# EAGLE board MCP4725_Breakout-Panel-v14 (EAGLE 6.6.0), part 1 of 4
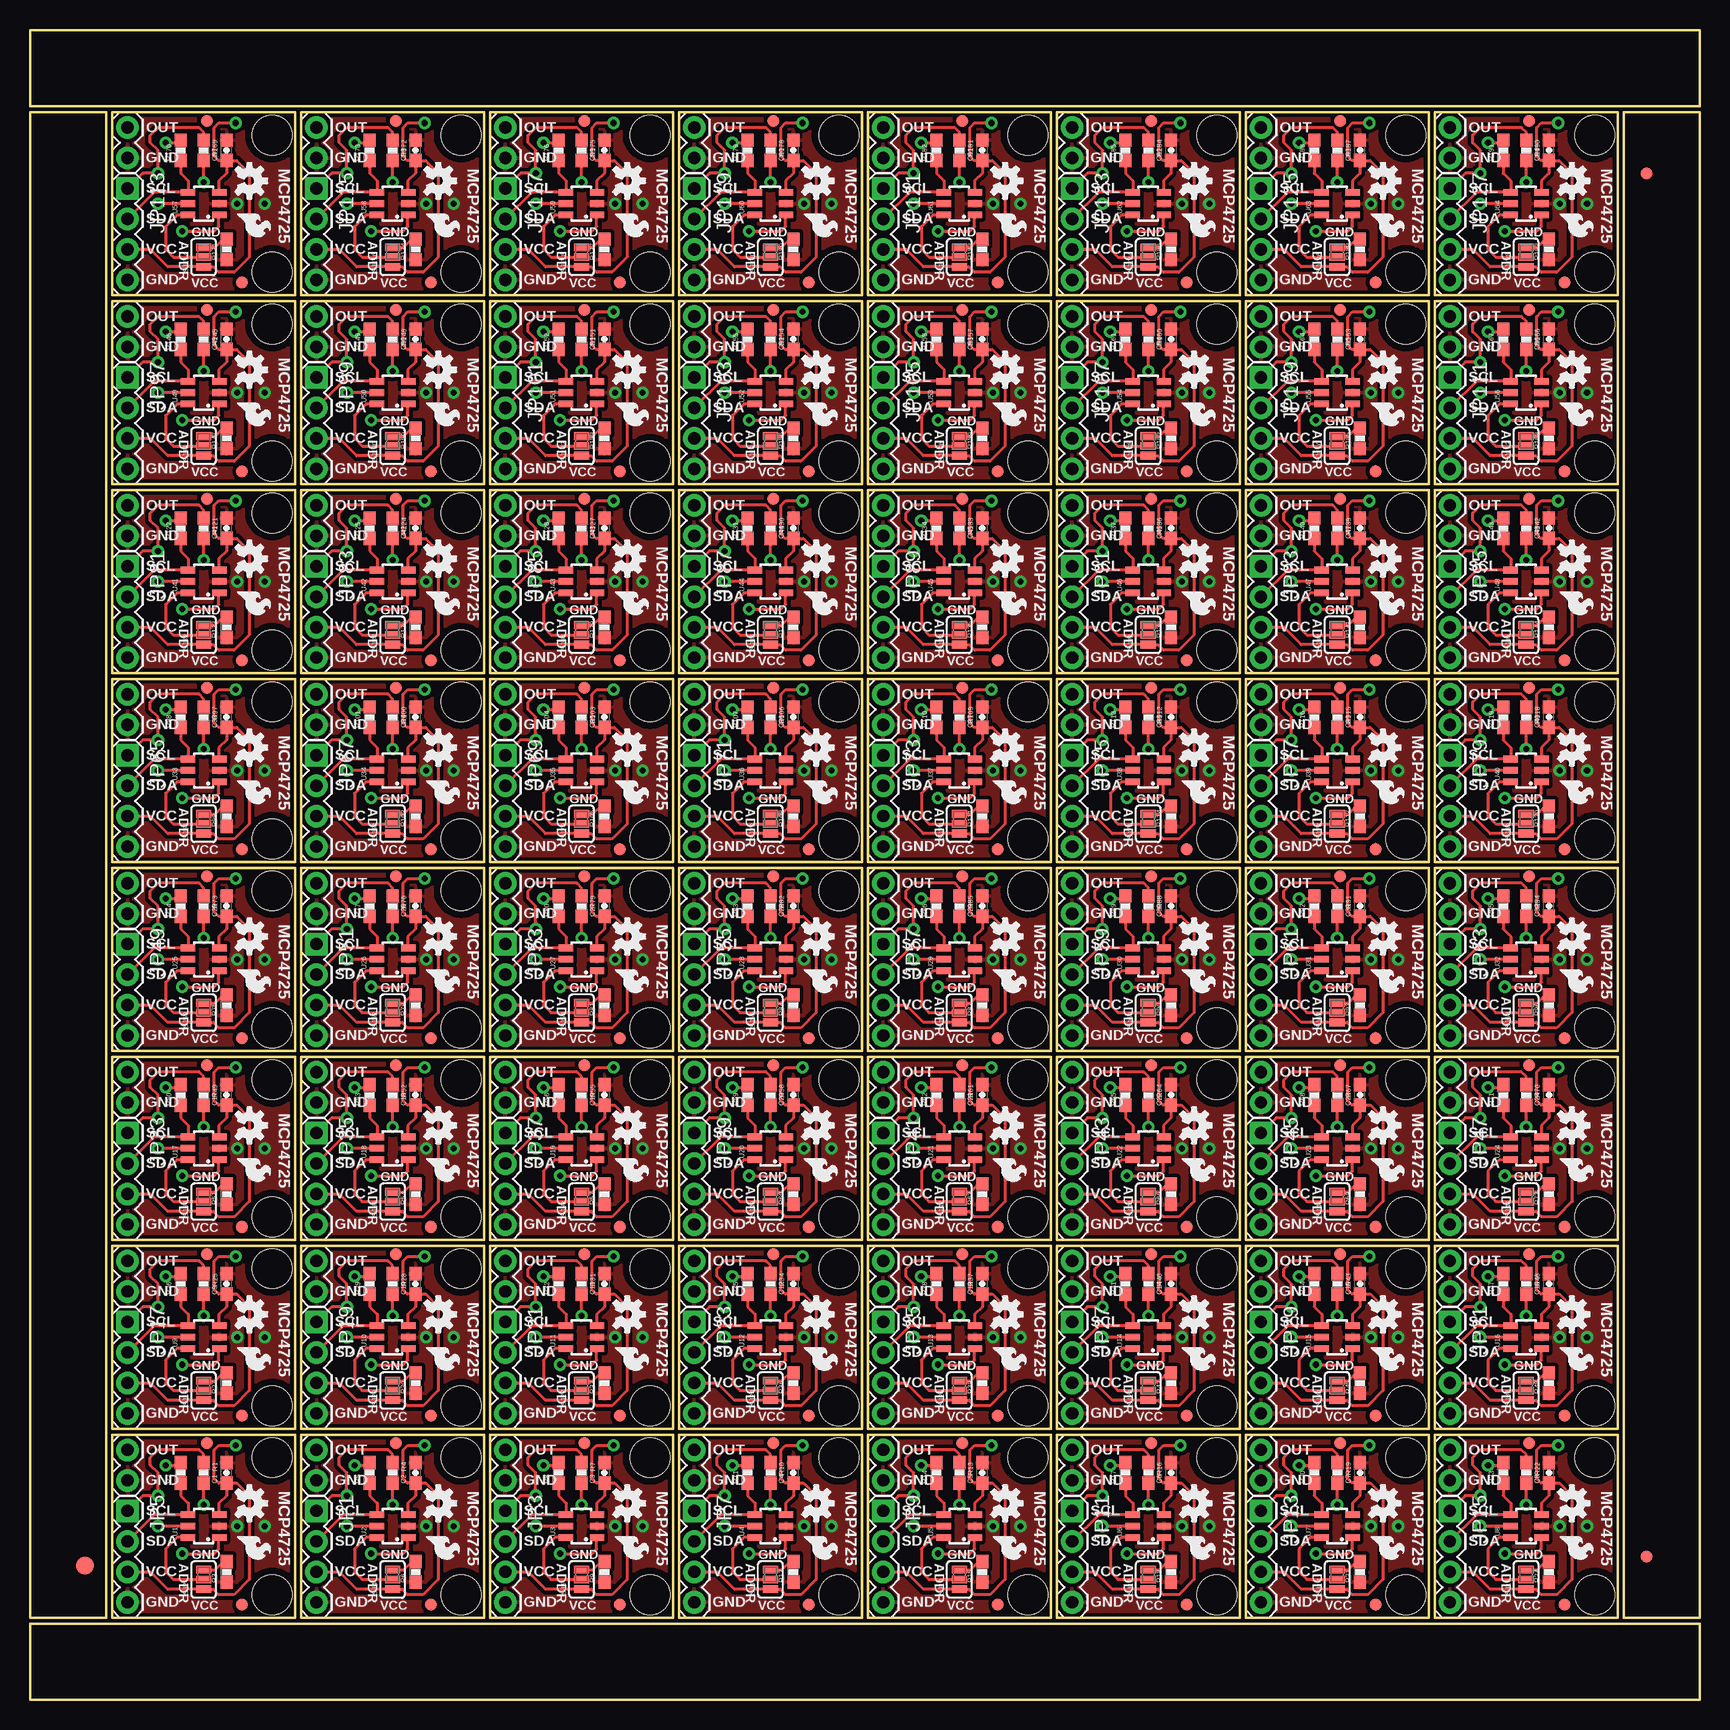
[diagram p0: board, top side]
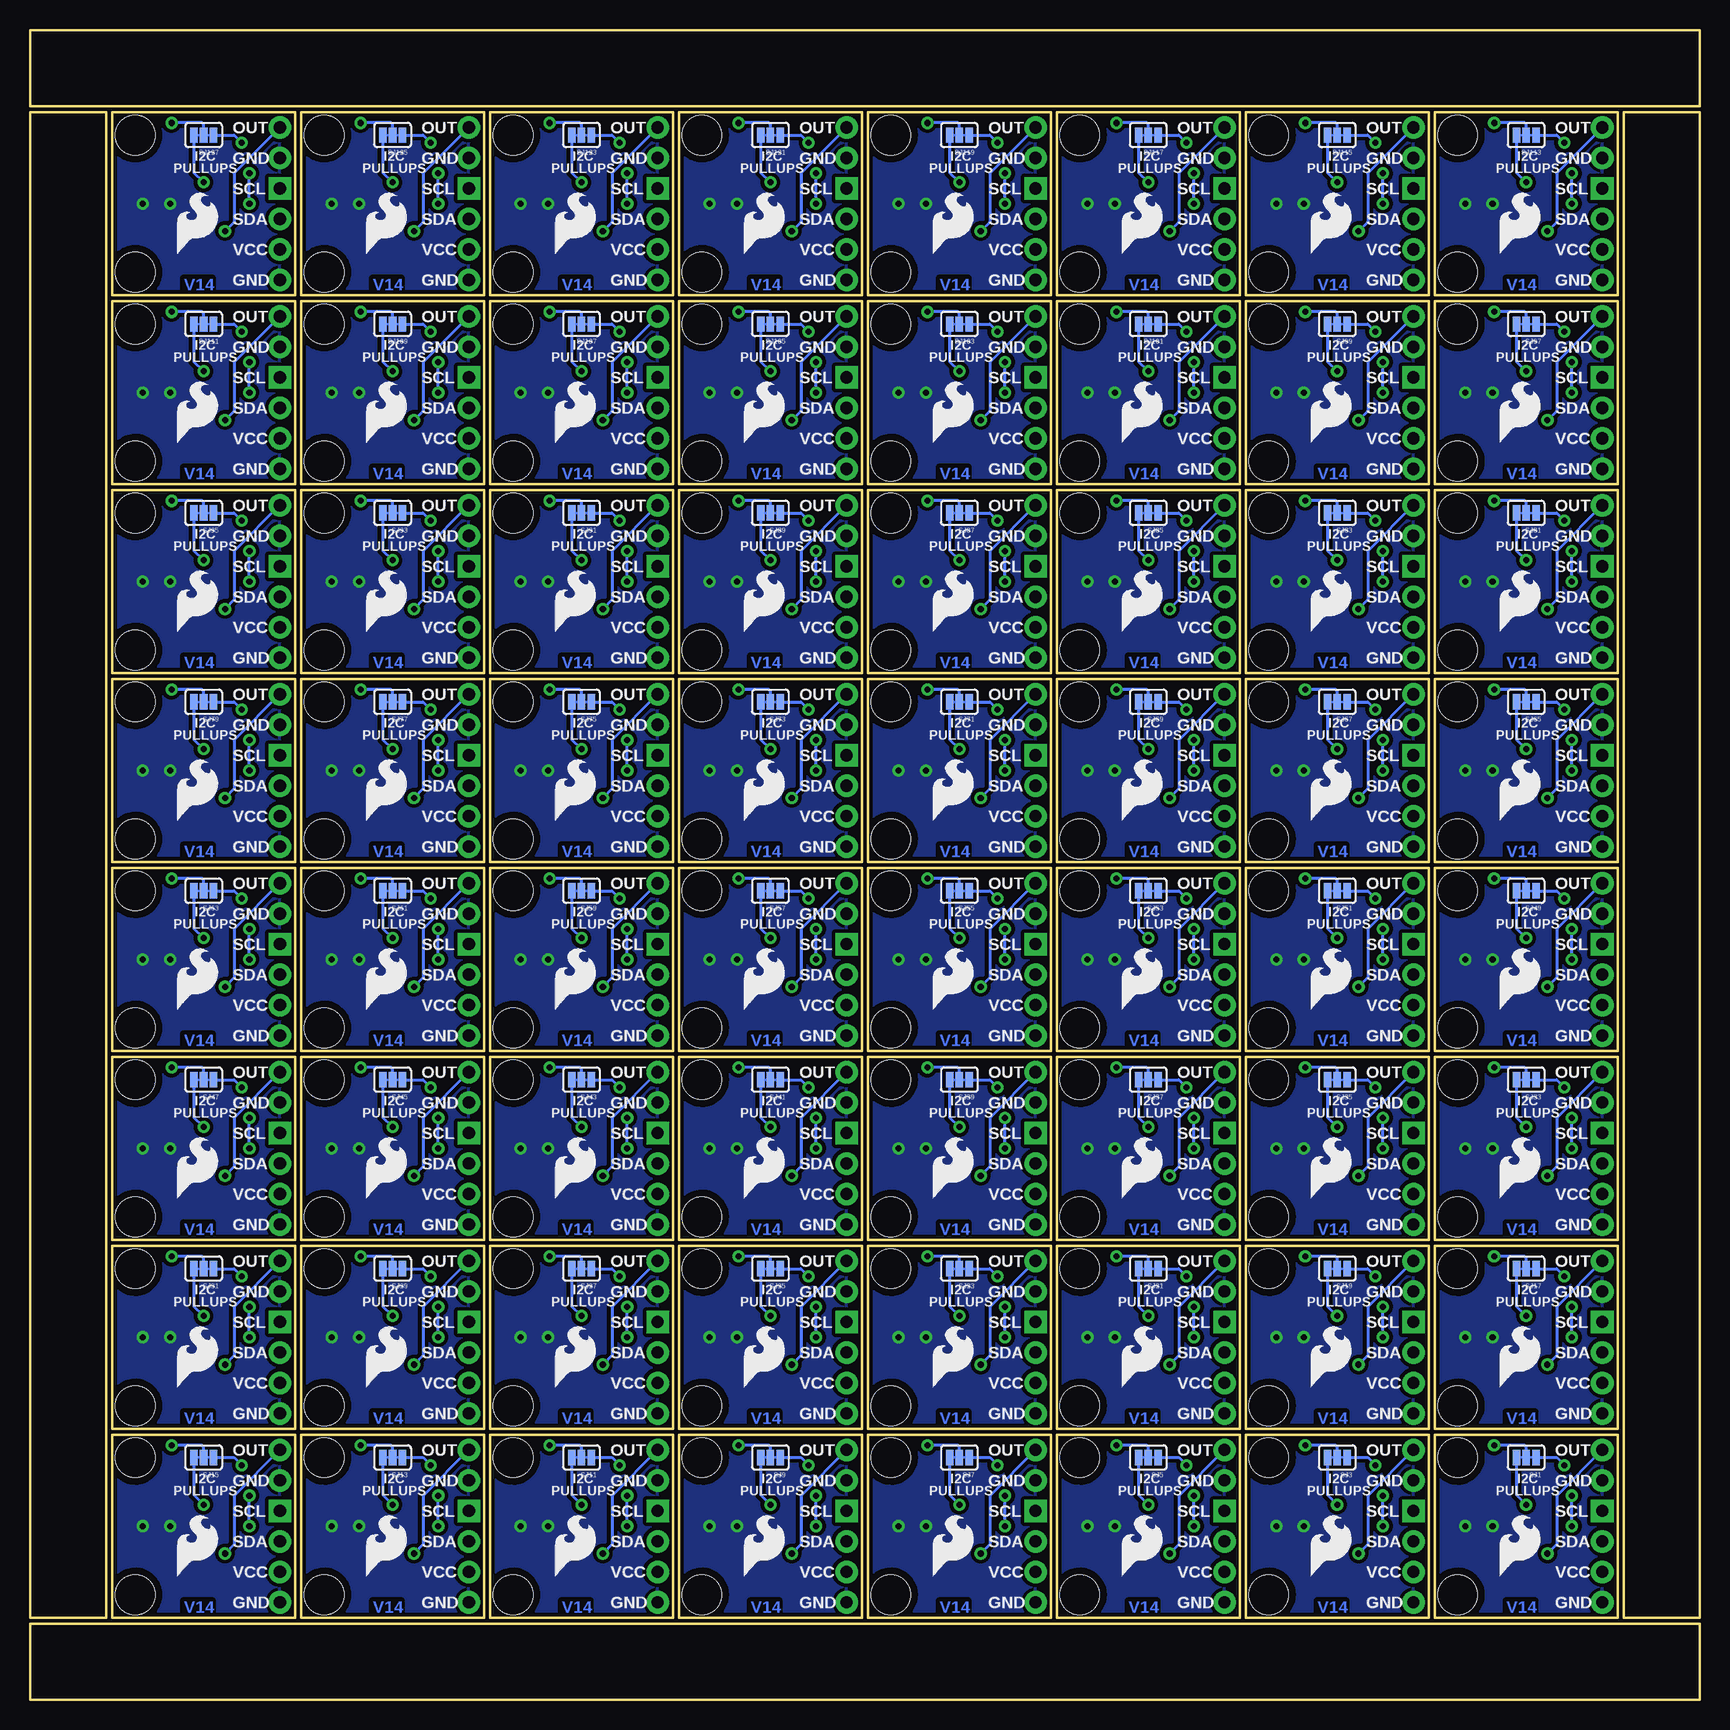
[diagram p1: board, bottom side, seen from below]

Size 139.19 x 139.19 mm. Coordinates in mm from the lower left corner, seen from the top.
Outline: 272 segments
Copper layers (1*16): Top 0.035mm / dielectric 1.5mm / Bottom 0.035mm
Design rules "SparkFun-2-layer": minimum track width 7mil, minimum drill 15mil, track to track 8mil, track to pad 8mil, pad to pad 8mil, via to via 8mil, smd to smd 8mil, copper to edge 8mil, drill to drill 8mil, minimum pad ring 12mil, minimum via ring 10mil, stop-mask expansion 4mil, vias tented up to drill 20mil, thermal gap 10mil

## Footprints (pad centres in the part's own frame; a part is rotated, then mirrored left to right if it is on the bottom)
0603-CAP = smd 1.1 x 1: 1 -0.85,0; 2 0.85,0
FIDUCIAL-1.5X3 = smd 1.5 x 1.5: 1 0,0
FIDUCIAL-1X2 = smd 1 x 1: 1 0,0
1X04 = drill 1.016 pad 1.88 square: 1 0,0 | drill 1.016 pad 1.88: 2 2.54,0; 3 5.08,0; 4 7.62,0
1X02 = drill 1.016 pad 1.88: 1 0,0; 2 2.54,0
0603-RES = smd 1.1 x 1: 1 -0.85,0; 2 0.85,0
PAD-JUMPER-3-3OF3_NC_BY_TRACE_YES_SILK_FULL_BOX = smd 0.635 x 1.27: 1 -0.813,0; 2 0,0; 3 0.813,0
PAD-JUMPER-3-2OF3_NC_BY_PASTE_YES_SILK_FULL_BOX = smd 0.635 x 1.27: 1 -0.813,0; 2 0,0; 3 0.813,0
STAND-OFF = hole 3.302: 0,0
SOT23-6-MCP4725 = smd 0.55 x 1.2: 1 0.95,-1.3; 2 0,-1.3; 3 -0.95,-1.3; 4 -0.95,1.3; 5 0,1.3; 6 0.95,1.3

## Placement (x,y rotation side)
C1  0.1uF  [0603-CAP]  16.38,18.92 90 top
C2  0.1uF  [0603-CAP]  32.13,18.92 90 top
C3  0.1uF  [0603-CAP]  47.88,18.92 90 top
C4  0.1uF  [0603-CAP]  63.63,18.92 90 top
C5  0.1uF  [0603-CAP]  79.38,18.92 90 top
C6  0.1uF  [0603-CAP]  95.12,18.92 90 top
C7  0.1uF  [0603-CAP]  110.87,18.92 90 top
C8  0.1uF  [0603-CAP]  126.62,18.92 90 top
C9  0.1uF  [0603-CAP]  16.38,34.67 90 top
C10  0.1uF  [0603-CAP]  32.13,34.67 90 top
C11  0.1uF  [0603-CAP]  47.88,34.67 90 top
C12  0.1uF  [0603-CAP]  63.63,34.67 90 top
C13  0.1uF  [0603-CAP]  79.38,34.67 90 top
C14  0.1uF  [0603-CAP]  95.12,34.67 90 top
C15  0.1uF  [0603-CAP]  110.87,34.67 90 top
C16  0.1uF  [0603-CAP]  126.62,34.67 90 top
C17  0.1uF  [0603-CAP]  16.38,50.42 90 top
C18  0.1uF  [0603-CAP]  32.13,50.42 90 top
C19  0.1uF  [0603-CAP]  47.88,50.42 90 top
C20  0.1uF  [0603-CAP]  63.63,50.42 90 top
C21  0.1uF  [0603-CAP]  79.38,50.42 90 top
C22  0.1uF  [0603-CAP]  95.12,50.42 90 top
C23  0.1uF  [0603-CAP]  110.87,50.42 90 top
C24  0.1uF  [0603-CAP]  126.62,50.42 90 top
C25  0.1uF  [0603-CAP]  16.38,66.17 90 top
C26  0.1uF  [0603-CAP]  32.13,66.17 90 top
C27  0.1uF  [0603-CAP]  47.88,66.17 90 top
C28  0.1uF  [0603-CAP]  63.63,66.17 90 top
C29  0.1uF  [0603-CAP]  79.38,66.17 90 top
C30  0.1uF  [0603-CAP]  95.12,66.17 90 top
C31  0.1uF  [0603-CAP]  110.87,66.17 90 top
C32  0.1uF  [0603-CAP]  126.62,66.17 90 top
C33  0.1uF  [0603-CAP]  16.38,81.92 90 top
C34  0.1uF  [0603-CAP]  32.13,81.92 90 top
C35  0.1uF  [0603-CAP]  47.88,81.92 90 top
C36  0.1uF  [0603-CAP]  63.63,81.92 90 top
C37  0.1uF  [0603-CAP]  79.38,81.92 90 top
C38  0.1uF  [0603-CAP]  95.12,81.92 90 top
C39  0.1uF  [0603-CAP]  110.87,81.92 90 top
C40  0.1uF  [0603-CAP]  126.62,81.92 90 top
C41  0.1uF  [0603-CAP]  16.38,97.66 90 top
C42  0.1uF  [0603-CAP]  32.13,97.66 90 top
C43  0.1uF  [0603-CAP]  47.88,97.66 90 top
C44  0.1uF  [0603-CAP]  63.63,97.66 90 top
C45  0.1uF  [0603-CAP]  79.38,97.66 90 top
C46  0.1uF  [0603-CAP]  95.12,97.66 90 top
C47  0.1uF  [0603-CAP]  110.87,97.66 90 top
C48  0.1uF  [0603-CAP]  126.62,97.66 90 top
C49  0.1uF  [0603-CAP]  16.38,113.41 90 top
C50  0.1uF  [0603-CAP]  32.13,113.41 90 top
C51  0.1uF  [0603-CAP]  47.88,113.41 90 top
C52  0.1uF  [0603-CAP]  63.63,113.41 90 top
C53  0.1uF  [0603-CAP]  79.38,113.41 90 top
C54  0.1uF  [0603-CAP]  95.12,113.41 90 top
C55  0.1uF  [0603-CAP]  110.87,113.41 90 top
C56  0.1uF  [0603-CAP]  126.62,113.41 90 top
C57  0.1uF  [0603-CAP]  16.38,129.16 90 top
C58  0.1uF  [0603-CAP]  32.13,129.16 90 top
C59  0.1uF  [0603-CAP]  47.88,129.16 90 top
C60  0.1uF  [0603-CAP]  63.63,129.16 90 top
C61  0.1uF  [0603-CAP]  79.38,129.16 90 top
C62  0.1uF  [0603-CAP]  95.12,129.16 90 top
C63  0.1uF  [0603-CAP]  110.87,129.16 90 top
C64  0.1uF  [0603-CAP]  126.62,129.16 90 top
E$1  [FIDUCIAL-1.5X3]  4.57,11.18 0 top
E$4  [FIDUCIAL-1X2]  134.75,11.94 0 top
E$5  [FIDUCIAL-1X2]  134.75,127.25 180 top
FID1  FIDUCIAL1X2  [FIDUCIAL-1X2]  17.68,7.92 0 top
FID2  FIDUCIAL1X2  [FIDUCIAL-1X2]  14.73,21.39 0 top
FID3  FIDUCIAL1X2  [FIDUCIAL-1X2]  33.43,7.92 0 top
FID4  FIDUCIAL1X2  [FIDUCIAL-1X2]  30.48,21.39 0 top
FID5  FIDUCIAL1X2  [FIDUCIAL-1X2]  49.17,7.92 0 top
FID6  FIDUCIAL1X2  [FIDUCIAL-1X2]  46.23,21.39 0 top
FID7  FIDUCIAL1X2  [FIDUCIAL-1X2]  64.92,7.92 0 top
FID8  FIDUCIAL1X2  [FIDUCIAL-1X2]  61.98,21.39 0 top
FID9  FIDUCIAL1X2  [FIDUCIAL-1X2]  80.67,7.92 0 top
FID10  FIDUCIAL1X2  [FIDUCIAL-1X2]  77.72,21.39 0 top
FID11  FIDUCIAL1X2  [FIDUCIAL-1X2]  96.42,7.92 0 top
FID12  FIDUCIAL1X2  [FIDUCIAL-1X2]  93.47,21.39 0 top
FID13  FIDUCIAL1X2  [FIDUCIAL-1X2]  112.17,7.92 0 top
FID14  FIDUCIAL1X2  [FIDUCIAL-1X2]  109.22,21.39 0 top
FID15  FIDUCIAL1X2  [FIDUCIAL-1X2]  127.91,7.92 0 top
FID16  FIDUCIAL1X2  [FIDUCIAL-1X2]  124.97,21.39 0 top
FID17  FIDUCIAL1X2  [FIDUCIAL-1X2]  17.68,23.67 0 top
FID18  FIDUCIAL1X2  [FIDUCIAL-1X2]  14.73,37.13 0 top
FID19  FIDUCIAL1X2  [FIDUCIAL-1X2]  33.43,23.67 0 top
FID20  FIDUCIAL1X2  [FIDUCIAL-1X2]  30.48,37.13 0 top
FID21  FIDUCIAL1X2  [FIDUCIAL-1X2]  49.17,23.67 0 top
FID22  FIDUCIAL1X2  [FIDUCIAL-1X2]  46.23,37.13 0 top
FID23  FIDUCIAL1X2  [FIDUCIAL-1X2]  64.92,23.67 0 top
FID24  FIDUCIAL1X2  [FIDUCIAL-1X2]  61.98,37.13 0 top
FID25  FIDUCIAL1X2  [FIDUCIAL-1X2]  80.67,23.67 0 top
FID26  FIDUCIAL1X2  [FIDUCIAL-1X2]  77.72,37.13 0 top
FID27  FIDUCIAL1X2  [FIDUCIAL-1X2]  96.42,23.67 0 top
FID28  FIDUCIAL1X2  [FIDUCIAL-1X2]  93.47,37.13 0 top
FID29  FIDUCIAL1X2  [FIDUCIAL-1X2]  112.17,23.67 0 top
FID30  FIDUCIAL1X2  [FIDUCIAL-1X2]  109.22,37.13 0 top
FID31  FIDUCIAL1X2  [FIDUCIAL-1X2]  127.91,23.67 0 top
FID32  FIDUCIAL1X2  [FIDUCIAL-1X2]  124.97,37.13 0 top
FID33  FIDUCIAL1X2  [FIDUCIAL-1X2]  17.68,39.42 0 top
FID34  FIDUCIAL1X2  [FIDUCIAL-1X2]  14.73,52.88 0 top
FID35  FIDUCIAL1X2  [FIDUCIAL-1X2]  33.43,39.42 0 top
FID36  FIDUCIAL1X2  [FIDUCIAL-1X2]  30.48,52.88 0 top
FID37  FIDUCIAL1X2  [FIDUCIAL-1X2]  49.17,39.42 0 top
FID38  FIDUCIAL1X2  [FIDUCIAL-1X2]  46.23,52.88 0 top
FID39  FIDUCIAL1X2  [FIDUCIAL-1X2]  64.92,39.42 0 top
FID40  FIDUCIAL1X2  [FIDUCIAL-1X2]  61.98,52.88 0 top
FID41  FIDUCIAL1X2  [FIDUCIAL-1X2]  80.67,39.42 0 top
FID42  FIDUCIAL1X2  [FIDUCIAL-1X2]  77.72,52.88 0 top
FID43  FIDUCIAL1X2  [FIDUCIAL-1X2]  96.42,39.42 0 top
FID44  FIDUCIAL1X2  [FIDUCIAL-1X2]  93.47,52.88 0 top
FID45  FIDUCIAL1X2  [FIDUCIAL-1X2]  112.17,39.42 0 top
FID46  FIDUCIAL1X2  [FIDUCIAL-1X2]  109.22,52.88 0 top
FID47  FIDUCIAL1X2  [FIDUCIAL-1X2]  127.91,39.42 0 top
FID48  FIDUCIAL1X2  [FIDUCIAL-1X2]  124.97,52.88 0 top
FID49  FIDUCIAL1X2  [FIDUCIAL-1X2]  17.68,55.17 0 top
FID50  FIDUCIAL1X2  [FIDUCIAL-1X2]  14.73,68.63 0 top
FID51  FIDUCIAL1X2  [FIDUCIAL-1X2]  33.43,55.17 0 top
FID52  FIDUCIAL1X2  [FIDUCIAL-1X2]  30.48,68.63 0 top
FID53  FIDUCIAL1X2  [FIDUCIAL-1X2]  49.17,55.17 0 top
FID54  FIDUCIAL1X2  [FIDUCIAL-1X2]  46.23,68.63 0 top
FID55  FIDUCIAL1X2  [FIDUCIAL-1X2]  64.92,55.17 0 top
FID56  FIDUCIAL1X2  [FIDUCIAL-1X2]  61.98,68.63 0 top
FID57  FIDUCIAL1X2  [FIDUCIAL-1X2]  80.67,55.17 0 top
FID58  FIDUCIAL1X2  [FIDUCIAL-1X2]  77.72,68.63 0 top
FID59  FIDUCIAL1X2  [FIDUCIAL-1X2]  96.42,55.17 0 top
FID60  FIDUCIAL1X2  [FIDUCIAL-1X2]  93.47,68.63 0 top
FID61  FIDUCIAL1X2  [FIDUCIAL-1X2]  112.17,55.17 0 top
FID62  FIDUCIAL1X2  [FIDUCIAL-1X2]  109.22,68.63 0 top
FID63  FIDUCIAL1X2  [FIDUCIAL-1X2]  127.91,55.17 0 top
FID64  FIDUCIAL1X2  [FIDUCIAL-1X2]  124.97,68.63 0 top
FID65  FIDUCIAL1X2  [FIDUCIAL-1X2]  17.68,70.92 0 top
FID66  FIDUCIAL1X2  [FIDUCIAL-1X2]  14.73,84.38 0 top
FID67  FIDUCIAL1X2  [FIDUCIAL-1X2]  33.43,70.92 0 top
FID68  FIDUCIAL1X2  [FIDUCIAL-1X2]  30.48,84.38 0 top
FID69  FIDUCIAL1X2  [FIDUCIAL-1X2]  49.17,70.92 0 top
FID70  FIDUCIAL1X2  [FIDUCIAL-1X2]  46.23,84.38 0 top
FID71  FIDUCIAL1X2  [FIDUCIAL-1X2]  64.92,70.92 0 top
FID72  FIDUCIAL1X2  [FIDUCIAL-1X2]  61.98,84.38 0 top
FID73  FIDUCIAL1X2  [FIDUCIAL-1X2]  80.67,70.92 0 top
FID74  FIDUCIAL1X2  [FIDUCIAL-1X2]  77.72,84.38 0 top
FID75  FIDUCIAL1X2  [FIDUCIAL-1X2]  96.42,70.92 0 top
FID76  FIDUCIAL1X2  [FIDUCIAL-1X2]  93.47,84.38 0 top
FID77  FIDUCIAL1X2  [FIDUCIAL-1X2]  112.17,70.92 0 top
FID78  FIDUCIAL1X2  [FIDUCIAL-1X2]  109.22,84.38 0 top
FID79  FIDUCIAL1X2  [FIDUCIAL-1X2]  127.91,70.92 0 top
FID80  FIDUCIAL1X2  [FIDUCIAL-1X2]  124.97,84.38 0 top
FID81  FIDUCIAL1X2  [FIDUCIAL-1X2]  17.68,86.66 0 top
FID82  FIDUCIAL1X2  [FIDUCIAL-1X2]  14.73,100.13 0 top
FID83  FIDUCIAL1X2  [FIDUCIAL-1X2]  33.43,86.66 0 top
FID84  FIDUCIAL1X2  [FIDUCIAL-1X2]  30.48,100.13 0 top
FID85  FIDUCIAL1X2  [FIDUCIAL-1X2]  49.17,86.66 0 top
FID86  FIDUCIAL1X2  [FIDUCIAL-1X2]  46.23,100.13 0 top
FID87  FIDUCIAL1X2  [FIDUCIAL-1X2]  64.92,86.66 0 top
FID88  FIDUCIAL1X2  [FIDUCIAL-1X2]  61.98,100.13 0 top
FID89  FIDUCIAL1X2  [FIDUCIAL-1X2]  80.67,86.66 0 top
FID90  FIDUCIAL1X2  [FIDUCIAL-1X2]  77.72,100.13 0 top
FID91  FIDUCIAL1X2  [FIDUCIAL-1X2]  96.42,86.66 0 top
FID92  FIDUCIAL1X2  [FIDUCIAL-1X2]  93.47,100.13 0 top
FID93  FIDUCIAL1X2  [FIDUCIAL-1X2]  112.17,86.66 0 top
FID94  FIDUCIAL1X2  [FIDUCIAL-1X2]  109.22,100.13 0 top
FID95  FIDUCIAL1X2  [FIDUCIAL-1X2]  127.91,86.66 0 top
FID96  FIDUCIAL1X2  [FIDUCIAL-1X2]  124.97,100.13 0 top
FID97  FIDUCIAL1X2  [FIDUCIAL-1X2]  17.68,102.41 0 top
FID98  FIDUCIAL1X2  [FIDUCIAL-1X2]  14.73,115.87 0 top
FID99  FIDUCIAL1X2  [FIDUCIAL-1X2]  33.43,102.41 0 top
FID100  FIDUCIAL1X2  [FIDUCIAL-1X2]  30.48,115.87 0 top
FID101  FIDUCIAL1X2  [FIDUCIAL-1X2]  49.17,102.41 0 top
FID102  FIDUCIAL1X2  [FIDUCIAL-1X2]  46.23,115.87 0 top
FID103  FIDUCIAL1X2  [FIDUCIAL-1X2]  64.92,102.41 0 top
FID104  FIDUCIAL1X2  [FIDUCIAL-1X2]  61.98,115.87 0 top
FID105  FIDUCIAL1X2  [FIDUCIAL-1X2]  80.67,102.41 0 top
FID106  FIDUCIAL1X2  [FIDUCIAL-1X2]  77.72,115.87 0 top
FID107  FIDUCIAL1X2  [FIDUCIAL-1X2]  96.42,102.41 0 top
FID108  FIDUCIAL1X2  [FIDUCIAL-1X2]  93.47,115.87 0 top
FID109  FIDUCIAL1X2  [FIDUCIAL-1X2]  112.17,102.41 0 top
FID110  FIDUCIAL1X2  [FIDUCIAL-1X2]  109.22,115.87 0 top
FID111  FIDUCIAL1X2  [FIDUCIAL-1X2]  127.91,102.41 0 top
FID112  FIDUCIAL1X2  [FIDUCIAL-1X2]  124.97,115.87 0 top
FID113  FIDUCIAL1X2  [FIDUCIAL-1X2]  17.68,118.16 0 top
FID114  FIDUCIAL1X2  [FIDUCIAL-1X2]  14.73,131.62 0 top
FID115  FIDUCIAL1X2  [FIDUCIAL-1X2]  33.43,118.16 0 top
FID116  FIDUCIAL1X2  [FIDUCIAL-1X2]  30.48,131.62 0 top
FID117  FIDUCIAL1X2  [FIDUCIAL-1X2]  49.17,118.16 0 top
FID118  FIDUCIAL1X2  [FIDUCIAL-1X2]  46.23,131.62 0 top
FID119  FIDUCIAL1X2  [FIDUCIAL-1X2]  64.92,118.16 0 top
FID120  FIDUCIAL1X2  [FIDUCIAL-1X2]  61.98,131.62 0 top
FID121  FIDUCIAL1X2  [FIDUCIAL-1X2]  80.67,118.16 0 top
FID122  FIDUCIAL1X2  [FIDUCIAL-1X2]  77.72,131.62 0 top
FID123  FIDUCIAL1X2  [FIDUCIAL-1X2]  96.42,118.16 0 top
FID124  FIDUCIAL1X2  [FIDUCIAL-1X2]  93.47,131.62 0 top
FID125  FIDUCIAL1X2  [FIDUCIAL-1X2]  112.17,118.16 0 top
FID126  FIDUCIAL1X2  [FIDUCIAL-1X2]  109.22,131.62 0 top
FID127  FIDUCIAL1X2  [FIDUCIAL-1X2]  127.91,118.16 0 top
FID128  FIDUCIAL1X2  [FIDUCIAL-1X2]  124.97,131.62 0 top
GND  LOGO-SFESK  [SFE-LOGO-FLAME]  17.27,13.59 270 top
GND1  LOGO-SFESK  [SFE-LOGO-FLAME]  33.02,13.59 270 top
GND2  LOGO-SFESK  [SFE-LOGO-FLAME]  48.77,13.59 270 top
GND3  LOGO-SFESK  [SFE-LOGO-FLAME]  64.52,13.59 270 top
GND4  LOGO-SFESK  [SFE-LOGO-FLAME]  80.26,13.59 270 top
GND5  LOGO-SFESK  [SFE-LOGO-FLAME]  96.01,13.59 270 top
GND6  LOGO-SFESK  [SFE-LOGO-FLAME]  111.76,13.59 270 top
GND7  LOGO-SFESK  [SFE-LOGO-FLAME]  127.51,13.59 270 top
GND8  LOGO-SFESK  [SFE-LOGO-FLAME]  17.27,29.34 270 top
GND9  LOGO-SFESK  [SFE-LOGO-FLAME]  33.02,29.34 270 top
GND10  LOGO-SFESK  [SFE-LOGO-FLAME]  48.77,29.34 270 top
GND11  LOGO-SFESK  [SFE-LOGO-FLAME]  64.52,29.34 270 top
GND12  LOGO-SFESK  [SFE-LOGO-FLAME]  80.26,29.34 270 top
GND13  LOGO-SFESK  [SFE-LOGO-FLAME]  96.01,29.34 270 top
GND14  LOGO-SFESK  [SFE-LOGO-FLAME]  111.76,29.34 270 top
GND15  LOGO-SFESK  [SFE-LOGO-FLAME]  127.51,29.34 270 top
GND16  LOGO-SFESK  [SFE-LOGO-FLAME]  17.27,45.09 270 top
GND17  LOGO-SFESK  [SFE-LOGO-FLAME]  33.02,45.09 270 top
GND18  LOGO-SFESK  [SFE-LOGO-FLAME]  48.77,45.09 270 top
GND19  LOGO-SFESK  [SFE-LOGO-FLAME]  64.52,45.09 270 top
GND20  LOGO-SFESK  [SFE-LOGO-FLAME]  80.26,45.09 270 top
GND21  LOGO-SFESK  [SFE-LOGO-FLAME]  96.01,45.09 270 top
GND22  LOGO-SFESK  [SFE-LOGO-FLAME]  111.76,45.09 270 top
GND23  LOGO-SFESK  [SFE-LOGO-FLAME]  127.51,45.09 270 top
GND24  LOGO-SFESK  [SFE-LOGO-FLAME]  17.27,60.83 270 top
GND25  LOGO-SFESK  [SFE-LOGO-FLAME]  33.02,60.83 270 top
GND26  LOGO-SFESK  [SFE-LOGO-FLAME]  48.77,60.83 270 top
GND27  LOGO-SFESK  [SFE-LOGO-FLAME]  64.52,60.83 270 top
GND28  LOGO-SFESK  [SFE-LOGO-FLAME]  80.26,60.83 270 top
GND29  LOGO-SFESK  [SFE-LOGO-FLAME]  96.01,60.83 270 top
GND30  LOGO-SFESK  [SFE-LOGO-FLAME]  111.76,60.83 270 top
GND31  LOGO-SFESK  [SFE-LOGO-FLAME]  127.51,60.83 270 top
GND32  LOGO-SFESK  [SFE-LOGO-FLAME]  17.27,76.58 270 top
GND33  LOGO-SFESK  [SFE-LOGO-FLAME]  33.02,76.58 270 top
GND34  LOGO-SFESK  [SFE-LOGO-FLAME]  48.77,76.58 270 top
GND35  LOGO-SFESK  [SFE-LOGO-FLAME]  64.52,76.58 270 top
GND36  LOGO-SFESK  [SFE-LOGO-FLAME]  80.26,76.58 270 top
GND37  LOGO-SFESK  [SFE-LOGO-FLAME]  96.01,76.58 270 top
GND38  LOGO-SFESK  [SFE-LOGO-FLAME]  111.76,76.58 270 top
GND39  LOGO-SFESK  [SFE-LOGO-FLAME]  127.51,76.58 270 top
GND40  LOGO-SFESK  [SFE-LOGO-FLAME]  17.27,92.33 270 top
GND41  LOGO-SFESK  [SFE-LOGO-FLAME]  33.02,92.33 270 top
GND42  LOGO-SFESK  [SFE-LOGO-FLAME]  48.77,92.33 270 top
GND43  LOGO-SFESK  [SFE-LOGO-FLAME]  64.52,92.33 270 top
GND44  LOGO-SFESK  [SFE-LOGO-FLAME]  80.26,92.33 270 top
GND45  LOGO-SFESK  [SFE-LOGO-FLAME]  96.01,92.33 270 top
GND46  LOGO-SFESK  [SFE-LOGO-FLAME]  111.76,92.33 270 top
GND47  LOGO-SFESK  [SFE-LOGO-FLAME]  127.51,92.33 270 top
GND48  LOGO-SFESK  [SFE-LOGO-FLAME]  17.27,108.08 270 top
GND49  LOGO-SFESK  [SFE-LOGO-FLAME]  33.02,108.08 270 top
GND50  LOGO-SFESK  [SFE-LOGO-FLAME]  48.77,108.08 270 top
GND51  LOGO-SFESK  [SFE-LOGO-FLAME]  64.52,108.08 270 top
GND52  LOGO-SFESK  [SFE-LOGO-FLAME]  80.26,108.08 270 top
GND53  LOGO-SFESK  [SFE-LOGO-FLAME]  96.01,108.08 270 top
GND54  LOGO-SFESK  [SFE-LOGO-FLAME]  111.76,108.08 270 top
GND55  LOGO-SFESK  [SFE-LOGO-FLAME]  127.51,108.08 270 top
GND56  LOGO-SFESK  [SFE-LOGO-FLAME]  17.27,123.83 270 top
GND57  LOGO-SFESK  [SFE-LOGO-FLAME]  33.02,123.83 270 top
GND58  LOGO-SFESK  [SFE-LOGO-FLAME]  48.77,123.83 270 top
GND59  LOGO-SFESK  [SFE-LOGO-FLAME]  64.52,123.83 270 top
GND60  LOGO-SFESK  [SFE-LOGO-FLAME]  80.26,123.83 270 top
GND61  LOGO-SFESK  [SFE-LOGO-FLAME]  96.01,123.83 270 top
GND62  LOGO-SFESK  [SFE-LOGO-FLAME]  111.76,123.83 270 top
GND63  LOGO-SFESK  [SFE-LOGO-FLAME]  127.51,123.83 270 top
JP1  [1X04]  23.88,15.75 270 top
JP2  M02PTH  [1X02]  23.88,18.29 90 top
JP3  [1X04]  39.62,15.75 270 top
JP4  M02PTH  [1X02]  39.62,18.29 90 top
JP5  [1X04]  8.13,15.75 270 top
JP6  M02PTH  [1X02]  8.13,18.29 90 top
JP7  [1X04]  55.37,15.75 270 top
JP8  M02PTH  [1X02]  55.37,18.29 90 top
JP9  [1X04]  71.12,15.75 270 top
JP10  M02PTH  [1X02]  71.12,18.29 90 top
JP11  [1X04]  86.87,15.75 270 top
JP12  M02PTH  [1X02]  86.87,18.29 90 top
JP13  [1X04]  102.62,15.75 270 top
JP14  M02PTH  [1X02]  102.62,18.29 90 top
JP15  [1X04]  118.36,15.75 270 top
JP16  M02PTH  [1X02]  118.36,18.29 90 top
JP17  [1X04]  8.13,31.5 270 top
JP18  M02PTH  [1X02]  8.13,34.04 90 top
JP19  [1X04]  23.88,31.5 270 top
JP20  M02PTH  [1X02]  23.88,34.04 90 top
JP21  [1X04]  39.62,31.5 270 top
JP22  M02PTH  [1X02]  39.62,34.04 90 top
JP23  [1X04]  55.37,31.5 270 top
JP24  M02PTH  [1X02]  55.37,34.04 90 top
JP25  [1X04]  71.12,31.5 270 top
JP26  M02PTH  [1X02]  71.12,34.04 90 top
JP27  [1X04]  86.87,31.5 270 top
JP28  M02PTH  [1X02]  86.87,34.04 90 top
JP29  [1X04]  102.62,31.5 270 top
JP30  M02PTH  [1X02]  102.62,34.04 90 top
JP31  [1X04]  118.36,31.5 270 top
JP32  M02PTH  [1X02]  118.36,34.04 90 top
JP33  [1X04]  8.13,47.24 270 top
JP34  M02PTH  [1X02]  8.13,49.78 90 top
JP35  [1X04]  23.88,47.24 270 top
JP36  M02PTH  [1X02]  23.88,49.78 90 top
JP37  [1X04]  39.62,47.24 270 top
JP38  M02PTH  [1X02]  39.62,49.78 90 top
JP39  [1X04]  55.37,47.24 270 top
JP40  M02PTH  [1X02]  55.37,49.78 90 top
JP41  [1X04]  71.12,47.24 270 top
JP42  M02PTH  [1X02]  71.12,49.78 90 top
JP43  [1X04]  86.87,47.24 270 top
JP44  M02PTH  [1X02]  86.87,49.78 90 top
JP45  [1X04]  102.62,47.24 270 top
JP46  M02PTH  [1X02]  102.62,49.78 90 top
JP47  [1X04]  118.36,47.24 270 top
JP48  M02PTH  [1X02]  118.36,49.78 90 top
JP49  [1X04]  8.13,62.99 270 top
JP50  M02PTH  [1X02]  8.13,65.53 90 top
JP51  [1X04]  23.88,62.99 270 top
JP52  M02PTH  [1X02]  23.88,65.53 90 top
JP53  [1X04]  39.62,62.99 270 top
JP54  M02PTH  [1X02]  39.62,65.53 90 top
JP55  [1X04]  55.37,62.99 270 top
JP56  M02PTH  [1X02]  55.37,65.53 90 top
JP57  [1X04]  71.12,62.99 270 top
JP58  M02PTH  [1X02]  71.12,65.53 90 top
JP59  [1X04]  86.87,62.99 270 top
JP60  M02PTH  [1X02]  86.87,65.53 90 top
JP61  [1X04]  102.62,62.99 270 top
JP62  M02PTH  [1X02]  102.62,65.53 90 top
JP63  [1X04]  118.36,62.99 270 top
JP64  M02PTH  [1X02]  118.36,65.53 90 top
JP65  [1X04]  8.13,78.74 270 top
JP66  M02PTH  [1X02]  8.13,81.28 90 top
JP67  [1X04]  23.88,78.74 270 top
JP68  M02PTH  [1X02]  23.88,81.28 90 top
JP69  [1X04]  39.62,78.74 270 top
JP70  M02PTH  [1X02]  39.62,81.28 90 top
JP71  [1X04]  55.37,78.74 270 top
JP72  M02PTH  [1X02]  55.37,81.28 90 top
JP73  [1X04]  71.12,78.74 270 top
JP74  M02PTH  [1X02]  71.12,81.28 90 top
JP75  [1X04]  86.87,78.74 270 top
JP76  M02PTH  [1X02]  86.87,81.28 90 top
JP77  [1X04]  102.62,78.74 270 top
JP78  M02PTH  [1X02]  102.62,81.28 90 top
JP79  [1X04]  118.36,78.74 270 top
JP80  M02PTH  [1X02]  118.36,81.28 90 top
JP81  [1X04]  8.13,94.49 270 top
JP82  M02PTH  [1X02]  8.13,97.03 90 top
JP83  [1X04]  23.88,94.49 270 top
JP84  M02PTH  [1X02]  23.88,97.03 90 top
JP85  [1X04]  39.62,94.49 270 top
JP86  M02PTH  [1X02]  39.62,97.03 90 top
JP87  [1X04]  55.37,94.49 270 top
JP88  M02PTH  [1X02]  55.37,97.03 90 top
JP89  [1X04]  71.12,94.49 270 top
JP90  M02PTH  [1X02]  71.12,97.03 90 top
JP91  [1X04]  86.87,94.49 270 top
JP92  M02PTH  [1X02]  86.87,97.03 90 top
JP93  [1X04]  102.62,94.49 270 top
JP94  M02PTH  [1X02]  102.62,97.03 90 top
JP95  [1X04]  118.36,94.49 270 top
JP96  M02PTH  [1X02]  118.36,97.03 90 top
JP97  [1X04]  8.13,110.24 270 top
JP98  M02PTH  [1X02]  8.13,112.78 90 top
JP99  [1X04]  23.88,110.24 270 top
JP100  M02PTH  [1X02]  23.88,112.78 90 top
JP101  [1X04]  39.62,110.24 270 top
JP102  M02PTH  [1X02]  39.62,112.78 90 top
JP103  [1X04]  55.37,110.24 270 top
JP104  M02PTH  [1X02]  55.37,112.78 90 top
JP105  [1X04]  71.12,110.24 270 top
JP106  M02PTH  [1X02]  71.12,112.78 90 top
JP107  [1X04]  86.87,110.24 270 top
JP108  M02PTH  [1X02]  86.87,112.78 90 top
JP109  [1X04]  102.62,110.24 270 top
JP110  M02PTH  [1X02]  102.62,112.78 90 top
JP111  [1X04]  118.36,110.24 270 top
JP112  M02PTH  [1X02]  118.36,112.78 90 top
JP113  [1X04]  8.13,125.98 270 top
JP114  M02PTH  [1X02]  8.13,128.52 90 top
JP115  [1X04]  23.88,125.98 270 top
JP116  M02PTH  [1X02]  23.88,128.52 90 top
JP117  [1X04]  39.62,125.98 270 top
JP118  M02PTH  [1X02]  39.62,128.52 90 top
JP119  [1X04]  55.37,125.98 270 top
JP120  M02PTH  [1X02]  55.37,128.52 90 top
JP121  [1X04]  71.12,125.98 270 top
JP122  M02PTH  [1X02]  71.12,128.52 90 top
JP123  [1X04]  86.87,125.98 270 top
JP124  M02PTH  [1X02]  86.87,128.52 90 top
JP125  [1X04]  102.62,125.98 270 top
JP126  M02PTH  [1X02]  102.62,128.52 90 top
JP127  [1X04]  118.36,125.98 270 top
JP128  M02PTH  [1X02]  118.36,128.52 90 top
LOGO1  OSHW-LOGOS  [OSHW-LOGO-S]  18.29,16.38 270 top
LOGO2  OSHW-LOGOS  [OSHW-LOGO-S]  34.04,16.38 270 top
LOGO3  OSHW-LOGOS  [OSHW-LOGO-S]  49.78,16.38 270 top
LOGO4  OSHW-LOGOS  [OSHW-LOGO-S]  65.53,16.38 270 top
LOGO5  OSHW-LOGOS  [OSHW-LOGO-S]  81.28,16.38 270 top
LOGO6  OSHW-LOGOS  [OSHW-LOGO-S]  97.03,16.38 270 top
LOGO7  OSHW-LOGOS  [OSHW-LOGO-S]  112.78,16.38 270 top
LOGO8  OSHW-LOGOS  [OSHW-LOGO-S]  128.52,16.38 270 top
LOGO9  OSHW-LOGOS  [OSHW-LOGO-S]  18.29,32.13 270 top
LOGO10  OSHW-LOGOS  [OSHW-LOGO-S]  34.04,32.13 270 top
LOGO11  OSHW-LOGOS  [OSHW-LOGO-S]  49.78,32.13 270 top
LOGO12  OSHW-LOGOS  [OSHW-LOGO-S]  65.53,32.13 270 top
LOGO13  OSHW-LOGOS  [OSHW-LOGO-S]  81.28,32.13 270 top
LOGO14  OSHW-LOGOS  [OSHW-LOGO-S]  97.03,32.13 270 top
LOGO15  OSHW-LOGOS  [OSHW-LOGO-S]  112.78,32.13 270 top
LOGO16  OSHW-LOGOS  [OSHW-LOGO-S]  128.52,32.13 270 top
LOGO17  OSHW-LOGOS  [OSHW-LOGO-S]  18.29,47.88 270 top
LOGO18  OSHW-LOGOS  [OSHW-LOGO-S]  34.04,47.88 270 top
LOGO19  OSHW-LOGOS  [OSHW-LOGO-S]  49.78,47.88 270 top
LOGO20  OSHW-LOGOS  [OSHW-LOGO-S]  65.53,47.88 270 top
LOGO21  OSHW-LOGOS  [OSHW-LOGO-S]  81.28,47.88 270 top
LOGO22  OSHW-LOGOS  [OSHW-LOGO-S]  97.03,47.88 270 top
LOGO23  OSHW-LOGOS  [OSHW-LOGO-S]  112.78,47.88 270 top
LOGO24  OSHW-LOGOS  [OSHW-LOGO-S]  128.52,47.88 270 top
LOGO25  OSHW-LOGOS  [OSHW-LOGO-S]  18.29,63.63 270 top
LOGO26  OSHW-LOGOS  [OSHW-LOGO-S]  34.04,63.63 270 top
LOGO27  OSHW-LOGOS  [OSHW-LOGO-S]  49.78,63.63 270 top
LOGO28  OSHW-LOGOS  [OSHW-LOGO-S]  65.53,63.63 270 top
LOGO29  OSHW-LOGOS  [OSHW-LOGO-S]  81.28,63.63 270 top
LOGO30  OSHW-LOGOS  [OSHW-LOGO-S]  97.03,63.63 270 top
LOGO31  OSHW-LOGOS  [OSHW-LOGO-S]  112.78,63.63 270 top
LOGO32  OSHW-LOGOS  [OSHW-LOGO-S]  128.52,63.63 270 top
LOGO33  OSHW-LOGOS  [OSHW-LOGO-S]  18.29,79.38 270 top
LOGO34  OSHW-LOGOS  [OSHW-LOGO-S]  34.04,79.38 270 top
LOGO35  OSHW-LOGOS  [OSHW-LOGO-S]  49.78,79.38 270 top
LOGO36  OSHW-LOGOS  [OSHW-LOGO-S]  65.53,79.38 270 top
LOGO37  OSHW-LOGOS  [OSHW-LOGO-S]  81.28,79.38 270 top
LOGO38  OSHW-LOGOS  [OSHW-LOGO-S]  97.03,79.38 270 top
LOGO39  OSHW-LOGOS  [OSHW-LOGO-S]  112.78,79.38 270 top
LOGO40  OSHW-LOGOS  [OSHW-LOGO-S]  128.52,79.38 270 top
LOGO41  OSHW-LOGOS  [OSHW-LOGO-S]  18.29,95.12 270 top
LOGO42  OSHW-LOGOS  [OSHW-LOGO-S]  34.04,95.12 270 top
LOGO43  OSHW-LOGOS  [OSHW-LOGO-S]  49.78,95.12 270 top
LOGO44  OSHW-LOGOS  [OSHW-LOGO-S]  65.53,95.12 270 top
LOGO45  OSHW-LOGOS  [OSHW-LOGO-S]  81.28,95.12 270 top
LOGO46  OSHW-LOGOS  [OSHW-LOGO-S]  97.03,95.12 270 top
LOGO47  OSHW-LOGOS  [OSHW-LOGO-S]  112.78,95.12 270 top
LOGO48  OSHW-LOGOS  [OSHW-LOGO-S]  128.52,95.12 270 top
LOGO49  OSHW-LOGOS  [OSHW-LOGO-S]  18.29,110.87 270 top
LOGO50  OSHW-LOGOS  [OSHW-LOGO-S]  34.04,110.87 270 top
LOGO51  OSHW-LOGOS  [OSHW-LOGO-S]  49.78,110.87 270 top
LOGO52  OSHW-LOGOS  [OSHW-LOGO-S]  65.53,110.87 270 top
LOGO53  OSHW-LOGOS  [OSHW-LOGO-S]  81.28,110.87 270 top
LOGO54  OSHW-LOGOS  [OSHW-LOGO-S]  97.03,110.87 270 top
LOGO55  OSHW-LOGOS  [OSHW-LOGO-S]  112.78,110.87 270 top
LOGO56  OSHW-LOGOS  [OSHW-LOGO-S]  128.52,110.87 270 top
LOGO57  OSHW-LOGOS  [OSHW-LOGO-S]  18.29,126.62 270 top
LOGO58  OSHW-LOGOS  [OSHW-LOGO-S]  34.04,126.62 270 top
LOGO59  OSHW-LOGOS  [OSHW-LOGO-S]  49.78,126.62 270 top
LOGO60  OSHW-LOGOS  [OSHW-LOGO-S]  65.53,126.62 270 top
LOGO61  OSHW-LOGOS  [OSHW-LOGO-S]  81.28,126.62 270 top
LOGO62  OSHW-LOGOS  [OSHW-LOGO-S]  97.03,126.62 270 top
LOGO63  OSHW-LOGOS  [OSHW-LOGO-S]  112.78,126.62 270 top
LOGO64  OSHW-LOGOS  [OSHW-LOGO-S]  128.52,126.62 270 top
R1  4.7k  [0603-RES]  14.48,18.92 270 top
R2  4.7k  [0603-RES]  12.57,18.92 90 top
R3  10k  [0603-RES]  16.38,10.67 90 top
R4  4.7k  [0603-RES]  30.23,18.92 270 top
R5  4.7k  [0603-RES]  28.32,18.92 90 top
R6  10k  [0603-RES]  32.13,10.67 90 top
R7  4.7k  [0603-RES]  45.97,18.92 270 top
R8  4.7k  [0603-RES]  44.07,18.92 90 top
R9  10k  [0603-RES]  47.88,10.67 90 top
R10  4.7k  [0603-RES]  61.72,18.92 270 top
R11  4.7k  [0603-RES]  59.82,18.92 90 top
R12  10k  [0603-RES]  63.63,10.67 90 top
R13  4.7k  [0603-RES]  77.47,18.92 270 top
R14  4.7k  [0603-RES]  75.56,18.92 90 top
R15  10k  [0603-RES]  79.38,10.67 90 top
R16  4.7k  [0603-RES]  93.22,18.92 270 top
R17  4.7k  [0603-RES]  91.31,18.92 90 top
R18  10k  [0603-RES]  95.12,10.67 90 top
R19  4.7k  [0603-RES]  108.97,18.92 270 top
R20  4.7k  [0603-RES]  107.06,18.92 90 top
R21  10k  [0603-RES]  110.87,10.67 90 top
R22  4.7k  [0603-RES]  124.71,18.92 270 top
R23  4.7k  [0603-RES]  122.81,18.92 90 top
R24  10k  [0603-RES]  126.62,10.67 90 top
R25  4.7k  [0603-RES]  14.48,34.67 270 top
R26  4.7k  [0603-RES]  12.57,34.67 90 top
R27  10k  [0603-RES]  16.38,26.42 90 top
R28  4.7k  [0603-RES]  30.23,34.67 270 top
R29  4.7k  [0603-RES]  28.32,34.67 90 top
R30  10k  [0603-RES]  32.13,26.42 90 top
R31  4.7k  [0603-RES]  45.97,34.67 270 top
R32  4.7k  [0603-RES]  44.07,34.67 90 top
R33  10k  [0603-RES]  47.88,26.42 90 top
R34  4.7k  [0603-RES]  61.72,34.67 270 top
R35  4.7k  [0603-RES]  59.82,34.67 90 top
R36  10k  [0603-RES]  63.63,26.42 90 top
R37  4.7k  [0603-RES]  77.47,34.67 270 top
R38  4.7k  [0603-RES]  75.56,34.67 90 top
R39  10k  [0603-RES]  79.38,26.42 90 top
R40  4.7k  [0603-RES]  93.22,34.67 270 top
R41  4.7k  [0603-RES]  91.31,34.67 90 top
R42  10k  [0603-RES]  95.12,26.42 90 top
R43  4.7k  [0603-RES]  108.97,34.67 270 top
R44  4.7k  [0603-RES]  107.06,34.67 90 top
R45  10k  [0603-RES]  110.87,26.42 90 top
R46  4.7k  [0603-RES]  124.71,34.67 270 top
R47  4.7k  [0603-RES]  122.81,34.67 90 top
R48  10k  [0603-RES]  126.62,26.42 90 top
R49  4.7k  [0603-RES]  14.48,50.42 270 top
R50  4.7k  [0603-RES]  12.57,50.42 90 top
R51  10k  [0603-RES]  16.38,42.16 90 top
R52  4.7k  [0603-RES]  30.23,50.42 270 top
R53  4.7k  [0603-RES]  28.32,50.42 90 top
R54  10k  [0603-RES]  32.13,42.16 90 top
R55  4.7k  [0603-RES]  45.97,50.42 270 top
R56  4.7k  [0603-RES]  44.07,50.42 90 top
R57  10k  [0603-RES]  47.88,42.16 90 top
R58  4.7k  [0603-RES]  61.72,50.42 270 top
R59  4.7k  [0603-RES]  59.82,50.42 90 top
R60  10k  [0603-RES]  63.63,42.16 90 top
R61  4.7k  [0603-RES]  77.47,50.42 270 top
R62  4.7k  [0603-RES]  75.56,50.42 90 top
R63  10k  [0603-RES]  79.38,42.16 90 top
R64  4.7k  [0603-RES]  93.22,50.42 270 top
R65  4.7k  [0603-RES]  91.31,50.42 90 top
R66  10k  [0603-RES]  95.12,42.16 90 top
R67  4.7k  [0603-RES]  108.97,50.42 270 top
R68  4.7k  [0603-RES]  107.06,50.42 90 top
R69  10k  [0603-RES]  110.87,42.16 90 top
R70  4.7k  [0603-RES]  124.71,50.42 270 top
R71  4.7k  [0603-RES]  122.81,50.42 90 top
R72  10k  [0603-RES]  126.62,42.16 90 top
R73  4.7k  [0603-RES]  14.48,66.17 270 top
R74  4.7k  [0603-RES]  12.57,66.17 90 top
R75  10k  [0603-RES]  16.38,57.91 90 top
R76  4.7k  [0603-RES]  30.23,66.17 270 top
R77  4.7k  [0603-RES]  28.32,66.17 90 top
R78  10k  [0603-RES]  32.13,57.91 90 top
R79  4.7k  [0603-RES]  45.97,66.17 270 top
R80  4.7k  [0603-RES]  44.07,66.17 90 top
R81  10k  [0603-RES]  47.88,57.91 90 top
R82  4.7k  [0603-RES]  61.72,66.17 270 top
R83  4.7k  [0603-RES]  59.82,66.17 90 top
R84  10k  [0603-RES]  63.63,57.91 90 top
R85  4.7k  [0603-RES]  77.47,66.17 270 top
R86  4.7k  [0603-RES]  75.56,66.17 90 top
R87  10k  [0603-RES]  79.38,57.91 90 top
R88  4.7k  [0603-RES]  93.22,66.17 270 top
R89  4.7k  [0603-RES]  91.31,66.17 90 top
R90  10k  [0603-RES]  95.12,57.91 90 top
R91  4.7k  [0603-RES]  108.97,66.17 270 top
R92  4.7k  [0603-RES]  107.06,66.17 90 top
R93  10k  [0603-RES]  110.87,57.91 90 top
R94  4.7k  [0603-RES]  124.71,66.17 270 top
R95  4.7k  [0603-RES]  122.81,66.17 90 top
R96  10k  [0603-RES]  126.62,57.91 90 top
R97  4.7k  [0603-RES]  14.48,81.92 270 top
R98  4.7k  [0603-RES]  12.57,81.92 90 top
R99  10k  [0603-RES]  16.38,73.66 90 top
R100  4.7k  [0603-RES]  30.23,81.92 270 top
R101  4.7k  [0603-RES]  28.32,81.92 90 top
R102  10k  [0603-RES]  32.13,73.66 90 top
R103  4.7k  [0603-RES]  45.97,81.92 270 top
R104  4.7k  [0603-RES]  44.07,81.92 90 top
R105  10k  [0603-RES]  47.88,73.66 90 top
R106  4.7k  [0603-RES]  61.72,81.92 270 top
R107  4.7k  [0603-RES]  59.82,81.92 90 top
R108  10k  [0603-RES]  63.63,73.66 90 top
R109  4.7k  [0603-RES]  77.47,81.92 270 top
R110  4.7k  [0603-RES]  75.56,81.92 90 top
R111  10k  [0603-RES]  79.38,73.66 90 top
R112  4.7k  [0603-RES]  93.22,81.92 270 top
R113  4.7k  [0603-RES]  91.31,81.92 90 top
R114  10k  [0603-RES]  95.12,73.66 90 top
R115  4.7k  [0603-RES]  108.97,81.92 270 top
R116  4.7k  [0603-RES]  107.06,81.92 90 top
R117  10k  [0603-RES]  110.87,73.66 90 top
R118  4.7k  [0603-RES]  124.71,81.92 270 top
R119  4.7k  [0603-RES]  122.81,81.92 90 top
R120  10k  [0603-RES]  126.62,73.66 90 top
R121  4.7k  [0603-RES]  14.48,97.66 270 top
R122  4.7k  [0603-RES]  12.57,97.66 90 top
R123  10k  [0603-RES]  16.38,89.41 90 top
R124  4.7k  [0603-RES]  30.23,97.66 270 top
R125  4.7k  [0603-RES]  28.32,97.66 90 top
R126  10k  [0603-RES]  32.13,89.41 90 top
R127  4.7k  [0603-RES]  45.97,97.66 270 top
R128  4.7k  [0603-RES]  44.07,97.66 90 top
R129  10k  [0603-RES]  47.88,89.41 90 top
R130  4.7k  [0603-RES]  61.72,97.66 270 top
R131  4.7k  [0603-RES]  59.82,97.66 90 top
R132  10k  [0603-RES]  63.63,89.41 90 top
R133  4.7k  [0603-RES]  77.47,97.66 270 top
R134  4.7k  [0603-RES]  75.56,97.66 90 top
R135  10k  [0603-RES]  79.38,89.41 90 top
R136  4.7k  [0603-RES]  93.22,97.66 270 top
R137  4.7k  [0603-RES]  91.31,97.66 90 top
R138  10k  [0603-RES]  95.12,89.41 90 top
R139  4.7k  [0603-RES]  108.97,97.66 270 top
R140  4.7k  [0603-RES]  107.06,97.66 90 top
R141  10k  [0603-RES]  110.87,89.41 90 top
R142  4.7k  [0603-RES]  124.71,97.66 270 top
R143  4.7k  [0603-RES]  122.81,97.66 90 top
R144  10k  [0603-RES]  126.62,89.41 90 top
R145  4.7k  [0603-RES]  14.48,113.41 270 top
R146  4.7k  [0603-RES]  12.57,113.41 90 top
R147  10k  [0603-RES]  16.38,105.16 90 top
R148  4.7k  [0603-RES]  30.23,113.41 270 top
R149  4.7k  [0603-RES]  28.32,113.41 90 top
R150  10k  [0603-RES]  32.13,105.16 90 top
R151  4.7k  [0603-RES]  45.97,113.41 270 top
R152  4.7k  [0603-RES]  44.07,113.41 90 top
R153  10k  [0603-RES]  47.88,105.16 90 top
R154  4.7k  [0603-RES]  61.72,113.41 270 top
R155  4.7k  [0603-RES]  59.82,113.41 90 top
R156  10k  [0603-RES]  63.63,105.16 90 top
R157  4.7k  [0603-RES]  77.47,113.41 270 top
R158  4.7k  [0603-RES]  75.56,113.41 90 top
R159  10k  [0603-RES]  79.38,105.16 90 top
R160  4.7k  [0603-RES]  93.22,113.41 270 top
R161  4.7k  [0603-RES]  91.31,113.41 90 top
R162  10k  [0603-RES]  95.12,105.16 90 top
R163  4.7k  [0603-RES]  108.97,113.41 270 top
R164  4.7k  [0603-RES]  107.06,113.41 90 top
R165  10k  [0603-RES]  110.87,105.16 90 top
R166  4.7k  [0603-RES]  124.71,113.41 270 top
R167  4.7k  [0603-RES]  122.81,113.41 90 top
R168  10k  [0603-RES]  126.62,105.16 90 top
R169  4.7k  [0603-RES]  14.48,129.16 270 top
R170  4.7k  [0603-RES]  12.57,129.16 90 top
R171  10k  [0603-RES]  16.38,120.9 90 top
R172  4.7k  [0603-RES]  30.23,129.16 270 top
R173  4.7k  [0603-RES]  28.32,129.16 90 top
R174  10k  [0603-RES]  32.13,120.9 90 top
R175  4.7k  [0603-RES]  45.97,129.16 270 top
R176  4.7k  [0603-RES]  44.07,129.16 90 top
R177  10k  [0603-RES]  47.88,120.9 90 top
R178  4.7k  [0603-RES]  61.72,129.16 270 top
R179  4.7k  [0603-RES]  59.82,129.16 90 top
R180  10k  [0603-RES]  63.63,120.9 90 top
R181  4.7k  [0603-RES]  77.47,129.16 270 top
R182  4.7k  [0603-RES]  75.56,129.16 90 top
R183  10k  [0603-RES]  79.38,120.9 90 top
R184  4.7k  [0603-RES]  93.22,129.16 270 top
R185  4.7k  [0603-RES]  91.31,129.16 90 top
R186  10k  [0603-RES]  95.12,120.9 90 top
R187  4.7k  [0603-RES]  108.97,129.16 270 top
R188  4.7k  [0603-RES]  107.06,129.16 90 top
R189  10k  [0603-RES]  110.87,120.9 90 top
R190  4.7k  [0603-RES]  124.71,129.16 270 top
R191  4.7k  [0603-RES]  122.81,129.16 90 top
R192  10k  [0603-RES]  126.62,120.9 90 top
SJ1  [PAD-JUMPER-3-3OF3_NC_BY_TRACE_YES_SILK_FULL_BOX]  14.48,20.19 180 bottom
SJ2  [PAD-JUMPER-3-2OF3_NC_BY_PASTE_YES_SILK_FULL_BOX]  14.48,10.03 90 top
SJ3  [PAD-JUMPER-3-3OF3_NC_BY_TRACE_YES_SILK_FULL_BOX]  30.23,20.19 180 bottom
SJ4  [PAD-JUMPER-3-2OF3_NC_BY_PASTE_YES_SILK_FULL_BOX]  30.23,10.03 90 top
SJ5  [PAD-JUMPER-3-3OF3_NC_BY_TRACE_YES_SILK_FULL_BOX]  45.97,20.19 180 bottom
SJ6  [PAD-JUMPER-3-2OF3_NC_BY_PASTE_YES_SILK_FULL_BOX]  45.97,10.03 90 top
SJ7  [PAD-JUMPER-3-3OF3_NC_BY_TRACE_YES_SILK_FULL_BOX]  61.72,20.19 180 bottom
SJ8  [PAD-JUMPER-3-2OF3_NC_BY_PASTE_YES_SILK_FULL_BOX]  61.72,10.03 90 top
SJ9  [PAD-JUMPER-3-3OF3_NC_BY_TRACE_YES_SILK_FULL_BOX]  77.47,20.19 180 bottom
SJ10  [PAD-JUMPER-3-2OF3_NC_BY_PASTE_YES_SILK_FULL_BOX]  77.47,10.03 90 top
SJ11  [PAD-JUMPER-3-3OF3_NC_BY_TRACE_YES_SILK_FULL_BOX]  93.22,20.19 180 bottom
SJ12  [PAD-JUMPER-3-2OF3_NC_BY_PASTE_YES_SILK_FULL_BOX]  93.22,10.03 90 top
SJ13  [PAD-JUMPER-3-3OF3_NC_BY_TRACE_YES_SILK_FULL_BOX]  108.97,20.19 180 bottom
SJ14  [PAD-JUMPER-3-2OF3_NC_BY_PASTE_YES_SILK_FULL_BOX]  108.97,10.03 90 top
SJ15  [PAD-JUMPER-3-3OF3_NC_BY_TRACE_YES_SILK_FULL_BOX]  124.71,20.19 180 bottom
SJ16  [PAD-JUMPER-3-2OF3_NC_BY_PASTE_YES_SILK_FULL_BOX]  124.71,10.03 90 top
SJ17  [PAD-JUMPER-3-3OF3_NC_BY_TRACE_YES_SILK_FULL_BOX]  14.48,35.94 180 bottom
SJ18  [PAD-JUMPER-3-2OF3_NC_BY_PASTE_YES_SILK_FULL_BOX]  14.48,25.78 90 top
SJ19  [PAD-JUMPER-3-3OF3_NC_BY_TRACE_YES_SILK_FULL_BOX]  30.23,35.94 180 bottom
SJ20  [PAD-JUMPER-3-2OF3_NC_BY_PASTE_YES_SILK_FULL_BOX]  30.23,25.78 90 top
SJ21  [PAD-JUMPER-3-3OF3_NC_BY_TRACE_YES_SILK_FULL_BOX]  45.97,35.94 180 bottom
SJ22  [PAD-JUMPER-3-2OF3_NC_BY_PASTE_YES_SILK_FULL_BOX]  45.97,25.78 90 top
SJ23  [PAD-JUMPER-3-3OF3_NC_BY_TRACE_YES_SILK_FULL_BOX]  61.72,35.94 180 bottom
SJ24  [PAD-JUMPER-3-2OF3_NC_BY_PASTE_YES_SILK_FULL_BOX]  61.72,25.78 90 top
SJ25  [PAD-JUMPER-3-3OF3_NC_BY_TRACE_YES_SILK_FULL_BOX]  77.47,35.94 180 bottom
SJ26  [PAD-JUMPER-3-2OF3_NC_BY_PASTE_YES_SILK_FULL_BOX]  77.47,25.78 90 top
SJ27  [PAD-JUMPER-3-3OF3_NC_BY_TRACE_YES_SILK_FULL_BOX]  93.22,35.94 180 bottom
SJ28  [PAD-JUMPER-3-2OF3_NC_BY_PASTE_YES_SILK_FULL_BOX]  93.22,25.78 90 top
SJ29  [PAD-JUMPER-3-3OF3_NC_BY_TRACE_YES_SILK_FULL_BOX]  108.97,35.94 180 bottom
SJ30  [PAD-JUMPER-3-2OF3_NC_BY_PASTE_YES_SILK_FULL_BOX]  108.97,25.78 90 top
SJ31  [PAD-JUMPER-3-3OF3_NC_BY_TRACE_YES_SILK_FULL_BOX]  124.71,35.94 180 bottom
SJ32  [PAD-JUMPER-3-2OF3_NC_BY_PASTE_YES_SILK_FULL_BOX]  124.71,25.78 90 top
SJ33  [PAD-JUMPER-3-3OF3_NC_BY_TRACE_YES_SILK_FULL_BOX]  14.48,51.69 180 bottom
SJ34  [PAD-JUMPER-3-2OF3_NC_BY_PASTE_YES_SILK_FULL_BOX]  14.48,41.53 90 top
SJ35  [PAD-JUMPER-3-3OF3_NC_BY_TRACE_YES_SILK_FULL_BOX]  30.23,51.69 180 bottom
SJ36  [PAD-JUMPER-3-2OF3_NC_BY_PASTE_YES_SILK_FULL_BOX]  30.23,41.53 90 top
SJ37  [PAD-JUMPER-3-3OF3_NC_BY_TRACE_YES_SILK_FULL_BOX]  45.97,51.69 180 bottom
SJ38  [PAD-JUMPER-3-2OF3_NC_BY_PASTE_YES_SILK_FULL_BOX]  45.97,41.53 90 top
SJ39  [PAD-JUMPER-3-3OF3_NC_BY_TRACE_YES_SILK_FULL_BOX]  61.72,51.69 180 bottom
SJ40  [PAD-JUMPER-3-2OF3_NC_BY_PASTE_YES_SILK_FULL_BOX]  61.72,41.53 90 top
SJ41  [PAD-JUMPER-3-3OF3_NC_BY_TRACE_YES_SILK_FULL_BOX]  77.47,51.69 180 bottom
SJ42  [PAD-JUMPER-3-2OF3_NC_BY_PASTE_YES_SILK_FULL_BOX]  77.47,41.53 90 top
SJ43  [PAD-JUMPER-3-3OF3_NC_BY_TRACE_YES_SILK_FULL_BOX]  93.22,51.69 180 bottom
SJ44  [PAD-JUMPER-3-2OF3_NC_BY_PASTE_YES_SILK_FULL_BOX]  93.22,41.53 90 top
SJ45  [PAD-JUMPER-3-3OF3_NC_BY_TRACE_YES_SILK_FULL_BOX]  108.97,51.69 180 bottom
SJ46  [PAD-JUMPER-3-2OF3_NC_BY_PASTE_YES_SILK_FULL_BOX]  108.97,41.53 90 top
SJ47  [PAD-JUMPER-3-3OF3_NC_BY_TRACE_YES_SILK_FULL_BOX]  124.71,51.69 180 bottom
SJ48  [PAD-JUMPER-3-2OF3_NC_BY_PASTE_YES_SILK_FULL_BOX]  124.71,41.53 90 top
SJ49  [PAD-JUMPER-3-3OF3_NC_BY_TRACE_YES_SILK_FULL_BOX]  14.48,67.44 180 bottom
SJ50  [PAD-JUMPER-3-2OF3_NC_BY_PASTE_YES_SILK_FULL_BOX]  14.48,57.28 90 top
SJ51  [PAD-JUMPER-3-3OF3_NC_BY_TRACE_YES_SILK_FULL_BOX]  30.23,67.44 180 bottom
SJ52  [PAD-JUMPER-3-2OF3_NC_BY_PASTE_YES_SILK_FULL_BOX]  30.23,57.28 90 top
SJ53  [PAD-JUMPER-3-3OF3_NC_BY_TRACE_YES_SILK_FULL_BOX]  45.97,67.44 180 bottom
SJ54  [PAD-JUMPER-3-2OF3_NC_BY_PASTE_YES_SILK_FULL_BOX]  45.97,57.28 90 top
SJ55  [PAD-JUMPER-3-3OF3_NC_BY_TRACE_YES_SILK_FULL_BOX]  61.72,67.44 180 bottom
SJ56  [PAD-JUMPER-3-2OF3_NC_BY_PASTE_YES_SILK_FULL_BOX]  61.72,57.28 90 top
SJ57  [PAD-JUMPER-3-3OF3_NC_BY_TRACE_YES_SILK_FULL_BOX]  77.47,67.44 180 bottom
SJ58  [PAD-JUMPER-3-2OF3_NC_BY_PASTE_YES_SILK_FULL_BOX]  77.47,57.28 90 top
SJ59  [PAD-JUMPER-3-3OF3_NC_BY_TRACE_YES_SILK_FULL_BOX]  93.22,67.44 180 bottom
SJ60  [PAD-JUMPER-3-2OF3_NC_BY_PASTE_YES_SILK_FULL_BOX]  93.22,57.28 90 top
SJ61  [PAD-JUMPER-3-3OF3_NC_BY_TRACE_YES_SILK_FULL_BOX]  108.97,67.44 180 bottom
SJ62  [PAD-JUMPER-3-2OF3_NC_BY_PASTE_YES_SILK_FULL_BOX]  108.97,57.28 90 top
SJ63  [PAD-JUMPER-3-3OF3_NC_BY_TRACE_YES_SILK_FULL_BOX]  124.71,67.44 180 bottom
SJ64  [PAD-JUMPER-3-2OF3_NC_BY_PASTE_YES_SILK_FULL_BOX]  124.71,57.28 90 top
SJ65  [PAD-JUMPER-3-3OF3_NC_BY_TRACE_YES_SILK_FULL_BOX]  14.48,83.19 180 bottom
SJ66  [PAD-JUMPER-3-2OF3_NC_BY_PASTE_YES_SILK_FULL_BOX]  14.48,73.03 90 top
SJ67  [PAD-JUMPER-3-3OF3_NC_BY_TRACE_YES_SILK_FULL_BOX]  30.23,83.19 180 bottom
SJ68  [PAD-JUMPER-3-2OF3_NC_BY_PASTE_YES_SILK_FULL_BOX]  30.23,73.03 90 top
SJ69  [PAD-JUMPER-3-3OF3_NC_BY_TRACE_YES_SILK_FULL_BOX]  45.97,83.19 180 bottom
SJ70  [PAD-JUMPER-3-2OF3_NC_BY_PASTE_YES_SILK_FULL_BOX]  45.97,73.03 90 top
SJ71  [PAD-JUMPER-3-3OF3_NC_BY_TRACE_YES_SILK_FULL_BOX]  61.72,83.19 180 bottom
SJ72  [PAD-JUMPER-3-2OF3_NC_BY_PASTE_YES_SILK_FULL_BOX]  61.72,73.03 90 top
SJ73  [PAD-JUMPER-3-3OF3_NC_BY_TRACE_YES_SILK_FULL_BOX]  77.47,83.19 180 bottom
SJ74  [PAD-JUMPER-3-2OF3_NC_BY_PASTE_YES_SILK_FULL_BOX]  77.47,73.03 90 top
SJ75  [PAD-JUMPER-3-3OF3_NC_BY_TRACE_YES_SILK_FULL_BOX]  93.22,83.19 180 bottom
SJ76  [PAD-JUMPER-3-2OF3_NC_BY_PASTE_YES_SILK_FULL_BOX]  93.22,73.03 90 top
SJ77  [PAD-JUMPER-3-3OF3_NC_BY_TRACE_YES_SILK_FULL_BOX]  108.97,83.19 180 bottom
SJ78  [PAD-JUMPER-3-2OF3_NC_BY_PASTE_YES_SILK_FULL_BOX]  108.97,73.03 90 top
SJ79  [PAD-JUMPER-3-3OF3_NC_BY_TRACE_YES_SILK_FULL_BOX]  124.71,83.19 180 bottom
SJ80  [PAD-JUMPER-3-2OF3_NC_BY_PASTE_YES_SILK_FULL_BOX]  124.71,73.03 90 top
SJ81  [PAD-JUMPER-3-3OF3_NC_BY_TRACE_YES_SILK_FULL_BOX]  14.48,98.93 180 bottom
SJ82  [PAD-JUMPER-3-2OF3_NC_BY_PASTE_YES_SILK_FULL_BOX]  14.48,88.77 90 top
SJ83  [PAD-JUMPER-3-3OF3_NC_BY_TRACE_YES_SILK_FULL_BOX]  30.23,98.93 180 bottom
SJ84  [PAD-JUMPER-3-2OF3_NC_BY_PASTE_YES_SILK_FULL_BOX]  30.23,88.77 90 top
SJ85  [PAD-JUMPER-3-3OF3_NC_BY_TRACE_YES_SILK_FULL_BOX]  45.97,98.93 180 bottom
SJ86  [PAD-JUMPER-3-2OF3_NC_BY_PASTE_YES_SILK_FULL_BOX]  45.97,88.77 90 top
SJ87  [PAD-JUMPER-3-3OF3_NC_BY_TRACE_YES_SILK_FULL_BOX]  61.72,98.93 180 bottom
SJ88  [PAD-JUMPER-3-2OF3_NC_BY_PASTE_YES_SILK_FULL_BOX]  61.72,88.77 90 top
SJ89  [PAD-JUMPER-3-3OF3_NC_BY_TRACE_YES_SILK_FULL_BOX]  77.47,98.93 180 bottom
SJ90  [PAD-JUMPER-3-2OF3_NC_BY_PASTE_YES_SILK_FULL_BOX]  77.47,88.77 90 top
SJ91  [PAD-JUMPER-3-3OF3_NC_BY_TRACE_YES_SILK_FULL_BOX]  93.22,98.93 180 bottom
SJ92  [PAD-JUMPER-3-2OF3_NC_BY_PASTE_YES_SILK_FULL_BOX]  93.22,88.77 90 top
SJ93  [PAD-JUMPER-3-3OF3_NC_BY_TRACE_YES_SILK_FULL_BOX]  108.97,98.93 180 bottom
SJ94  [PAD-JUMPER-3-2OF3_NC_BY_PASTE_YES_SILK_FULL_BOX]  108.97,88.77 90 top
SJ95  [PAD-JUMPER-3-3OF3_NC_BY_TRACE_YES_SILK_FULL_BOX]  124.71,98.93 180 bottom
SJ96  [PAD-JUMPER-3-2OF3_NC_BY_PASTE_YES_SILK_FULL_BOX]  124.71,88.77 90 top
SJ97  [PAD-JUMPER-3-3OF3_NC_BY_TRACE_YES_SILK_FULL_BOX]  14.48,114.68 180 bottom
SJ98  [PAD-JUMPER-3-2OF3_NC_BY_PASTE_YES_SILK_FULL_BOX]  14.48,104.52 90 top
SJ99  [PAD-JUMPER-3-3OF3_NC_BY_TRACE_YES_SILK_FULL_BOX]  30.23,114.68 180 bottom
SJ100  [PAD-JUMPER-3-2OF3_NC_BY_PASTE_YES_SILK_FULL_BOX]  30.23,104.52 90 top
SJ101  [PAD-JUMPER-3-3OF3_NC_BY_TRACE_YES_SILK_FULL_BOX]  45.97,114.68 180 bottom
SJ102  [PAD-JUMPER-3-2OF3_NC_BY_PASTE_YES_SILK_FULL_BOX]  45.97,104.52 90 top
SJ103  [PAD-JUMPER-3-3OF3_NC_BY_TRACE_YES_SILK_FULL_BOX]  61.72,114.68 180 bottom
SJ104  [PAD-JUMPER-3-2OF3_NC_BY_PASTE_YES_SILK_FULL_BOX]  61.72,104.52 90 top
SJ105  [PAD-JUMPER-3-3OF3_NC_BY_TRACE_YES_SILK_FULL_BOX]  77.47,114.68 180 bottom
SJ106  [PAD-JUMPER-3-2OF3_NC_BY_PASTE_YES_SILK_FULL_BOX]  77.47,104.52 90 top
SJ107  [PAD-JUMPER-3-3OF3_NC_BY_TRACE_YES_SILK_FULL_BOX]  93.22,114.68 180 bottom
SJ108  [PAD-JUMPER-3-2OF3_NC_BY_PASTE_YES_SILK_FULL_BOX]  93.22,104.52 90 top
SJ109  [PAD-JUMPER-3-3OF3_NC_BY_TRACE_YES_SILK_FULL_BOX]  108.97,114.68 180 bottom
SJ110  [PAD-JUMPER-3-2OF3_NC_BY_PASTE_YES_SILK_FULL_BOX]  108.97,104.52 90 top
SJ111  [PAD-JUMPER-3-3OF3_NC_BY_TRACE_YES_SILK_FULL_BOX]  124.71,114.68 180 bottom
SJ112  [PAD-JUMPER-3-2OF3_NC_BY_PASTE_YES_SILK_FULL_BOX]  124.71,104.52 90 top
SJ113  [PAD-JUMPER-3-3OF3_NC_BY_TRACE_YES_SILK_FULL_BOX]  14.48,130.43 180 bottom
SJ114  [PAD-JUMPER-3-2OF3_NC_BY_PASTE_YES_SILK_FULL_BOX]  14.48,120.27 90 top
SJ115  [PAD-JUMPER-3-3OF3_NC_BY_TRACE_YES_SILK_FULL_BOX]  30.23,130.43 180 bottom
SJ116  [PAD-JUMPER-3-2OF3_NC_BY_PASTE_YES_SILK_FULL_BOX]  30.23,120.27 90 top
SJ117  [PAD-JUMPER-3-3OF3_NC_BY_TRACE_YES_SILK_FULL_BOX]  45.97,130.43 180 bottom
SJ118  [PAD-JUMPER-3-2OF3_NC_BY_PASTE_YES_SILK_FULL_BOX]  45.97,120.27 90 top
SJ119  [PAD-JUMPER-3-3OF3_NC_BY_TRACE_YES_SILK_FULL_BOX]  61.72,130.43 180 bottom
SJ120  [PAD-JUMPER-3-2OF3_NC_BY_PASTE_YES_SILK_FULL_BOX]  61.72,120.27 90 top
SJ121  [PAD-JUMPER-3-3OF3_NC_BY_TRACE_YES_SILK_FULL_BOX]  77.47,130.43 180 bottom
SJ122  [PAD-JUMPER-3-2OF3_NC_BY_PASTE_YES_SILK_FULL_BOX]  77.47,120.27 90 top
SJ123  [PAD-JUMPER-3-3OF3_NC_BY_TRACE_YES_SILK_FULL_BOX]  93.22,130.43 180 bottom
SJ124  [PAD-JUMPER-3-2OF3_NC_BY_PASTE_YES_SILK_FULL_BOX]  93.22,120.27 90 top
SJ125  [PAD-JUMPER-3-3OF3_NC_BY_TRACE_YES_SILK_FULL_BOX]  108.97,130.43 180 bottom
SJ126  [PAD-JUMPER-3-2OF3_NC_BY_PASTE_YES_SILK_FULL_BOX]  108.97,120.27 90 top
SJ127  [PAD-JUMPER-3-3OF3_NC_BY_TRACE_YES_SILK_FULL_BOX]  124.71,130.43 180 bottom
SJ128  [PAD-JUMPER-3-2OF3_NC_BY_PASTE_YES_SILK_FULL_BOX]  124.71,120.27 90 top
STANDOFF1  STAND-OFF  [STAND-OFF]  20.19,20.19 0 top
STANDOFF2  STAND-OFF  [STAND-OFF]  20.19,8.76 0 top
STANDOFF3  STAND-OFF  [STAND-OFF]  35.94,20.19 0 top
STANDOFF4  STAND-OFF  [STAND-OFF]  35.94,8.76 0 top
STANDOFF5  STAND-OFF  [STAND-OFF]  51.69,20.19 0 top
STANDOFF6  STAND-OFF  [STAND-OFF]  51.69,8.76 0 top
STANDOFF7  STAND-OFF  [STAND-OFF]  67.44,20.19 0 top
STANDOFF8  STAND-OFF  [STAND-OFF]  67.44,8.76 0 top
STANDOFF9  STAND-OFF  [STAND-OFF]  83.19,20.19 0 top
STANDOFF10  STAND-OFF  [STAND-OFF]  83.19,8.76 0 top
STANDOFF11  STAND-OFF  [STAND-OFF]  98.93,20.19 0 top
STANDOFF12  STAND-OFF  [STAND-OFF]  98.93,8.76 0 top
STANDOFF13  STAND-OFF  [STAND-OFF]  114.68,20.19 0 top
STANDOFF14  STAND-OFF  [STAND-OFF]  114.68,8.76 0 top
STANDOFF15  STAND-OFF  [STAND-OFF]  130.43,20.19 0 top
STANDOFF16  STAND-OFF  [STAND-OFF]  130.43,8.76 0 top
STANDOFF17  STAND-OFF  [STAND-OFF]  20.19,35.94 0 top
STANDOFF18  STAND-OFF  [STAND-OFF]  20.19,24.51 0 top
STANDOFF19  STAND-OFF  [STAND-OFF]  35.94,35.94 0 top
STANDOFF20  STAND-OFF  [STAND-OFF]  35.94,24.51 0 top
STANDOFF21  STAND-OFF  [STAND-OFF]  51.69,35.94 0 top
STANDOFF22  STAND-OFF  [STAND-OFF]  51.69,24.51 0 top
STANDOFF23  STAND-OFF  [STAND-OFF]  67.44,35.94 0 top
STANDOFF24  STAND-OFF  [STAND-OFF]  67.44,24.51 0 top
STANDOFF25  STAND-OFF  [STAND-OFF]  83.19,35.94 0 top
STANDOFF26  STAND-OFF  [STAND-OFF]  83.19,24.51 0 top
STANDOFF27  STAND-OFF  [STAND-OFF]  98.93,35.94 0 top
STANDOFF28  STAND-OFF  [STAND-OFF]  98.93,24.51 0 top
STANDOFF29  STAND-OFF  [STAND-OFF]  114.68,35.94 0 top
STANDOFF30  STAND-OFF  [STAND-OFF]  114.68,24.51 0 top
STANDOFF31  STAND-OFF  [STAND-OFF]  130.43,35.94 0 top
STANDOFF32  STAND-OFF  [STAND-OFF]  130.43,24.51 0 top
STANDOFF33  STAND-OFF  [STAND-OFF]  20.19,51.69 0 top
STANDOFF34  STAND-OFF  [STAND-OFF]  20.19,40.26 0 top
STANDOFF35  STAND-OFF  [STAND-OFF]  35.94,51.69 0 top
STANDOFF36  STAND-OFF  [STAND-OFF]  35.94,40.26 0 top
STANDOFF37  STAND-OFF  [STAND-OFF]  51.69,51.69 0 top
STANDOFF38  STAND-OFF  [STAND-OFF]  51.69,40.26 0 top
STANDOFF39  STAND-OFF  [STAND-OFF]  67.44,51.69 0 top
STANDOFF40  STAND-OFF  [STAND-OFF]  67.44,40.26 0 top
STANDOFF41  STAND-OFF  [STAND-OFF]  83.19,51.69 0 top
STANDOFF42  STAND-OFF  [STAND-OFF]  83.19,40.26 0 top
STANDOFF43  STAND-OFF  [STAND-OFF]  98.93,51.69 0 top
STANDOFF44  STAND-OFF  [STAND-OFF]  98.93,40.26 0 top
STANDOFF45  STAND-OFF  [STAND-OFF]  114.68,51.69 0 top
STANDOFF46  STAND-OFF  [STAND-OFF]  114.68,40.26 0 top
STANDOFF47  STAND-OFF  [STAND-OFF]  130.43,51.69 0 top
STANDOFF48  STAND-OFF  [STAND-OFF]  130.43,40.26 0 top
STANDOFF49  STAND-OFF  [STAND-OFF]  20.19,67.44 0 top
STANDOFF50  STAND-OFF  [STAND-OFF]  20.19,56.01 0 top
STANDOFF51  STAND-OFF  [STAND-OFF]  35.94,67.44 0 top
STANDOFF52  STAND-OFF  [STAND-OFF]  35.94,56.01 0 top
STANDOFF53  STAND-OFF  [STAND-OFF]  51.69,67.44 0 top
STANDOFF54  STAND-OFF  [STAND-OFF]  51.69,56.01 0 top
STANDOFF55  STAND-OFF  [STAND-OFF]  67.44,67.44 0 top
STANDOFF56  STAND-OFF  [STAND-OFF]  67.44,56.01 0 top
STANDOFF57  STAND-OFF  [STAND-OFF]  83.19,67.44 0 top
STANDOFF58  STAND-OFF  [STAND-OFF]  83.19,56.01 0 top
STANDOFF59  STAND-OFF  [STAND-OFF]  98.93,67.44 0 top
STANDOFF60  STAND-OFF  [STAND-OFF]  98.93,56.01 0 top
STANDOFF61  STAND-OFF  [STAND-OFF]  114.68,67.44 0 top
STANDOFF62  STAND-OFF  [STAND-OFF]  114.68,56.01 0 top
STANDOFF63  STAND-OFF  [STAND-OFF]  130.43,67.44 0 top
STANDOFF64  STAND-OFF  [STAND-OFF]  130.43,56.01 0 top
STANDOFF65  STAND-OFF  [STAND-OFF]  20.19,83.19 0 top
STANDOFF66  STAND-OFF  [STAND-OFF]  20.19,71.75 0 top
STANDOFF67  STAND-OFF  [STAND-OFF]  35.94,83.19 0 top
STANDOFF68  STAND-OFF  [STAND-OFF]  35.94,71.75 0 top
STANDOFF69  STAND-OFF  [STAND-OFF]  51.69,83.19 0 top
STANDOFF70  STAND-OFF  [STAND-OFF]  51.69,71.75 0 top
STANDOFF71  STAND-OFF  [STAND-OFF]  67.44,83.19 0 top
STANDOFF72  STAND-OFF  [STAND-OFF]  67.44,71.75 0 top
STANDOFF73  STAND-OFF  [STAND-OFF]  83.19,83.19 0 top
STANDOFF74  STAND-OFF  [STAND-OFF]  83.19,71.75 0 top
STANDOFF75  STAND-OFF  [STAND-OFF]  98.93,83.19 0 top
STANDOFF76  STAND-OFF  [STAND-OFF]  98.93,71.75 0 top
STANDOFF77  STAND-OFF  [STAND-OFF]  114.68,83.19 0 top
STANDOFF78  STAND-OFF  [STAND-OFF]  114.68,71.75 0 top
STANDOFF79  STAND-OFF  [STAND-OFF]  130.43,83.19 0 top
STANDOFF80  STAND-OFF  [STAND-OFF]  130.43,71.75 0 top
STANDOFF81  STAND-OFF  [STAND-OFF]  20.19,98.93 0 top
STANDOFF82  STAND-OFF  [STAND-OFF]  20.19,87.5 0 top
STANDOFF83  STAND-OFF  [STAND-OFF]  35.94,98.93 0 top
STANDOFF84  STAND-OFF  [STAND-OFF]  35.94,87.5 0 top
STANDOFF85  STAND-OFF  [STAND-OFF]  51.69,98.93 0 top
STANDOFF86  STAND-OFF  [STAND-OFF]  51.69,87.5 0 top
STANDOFF87  STAND-OFF  [STAND-OFF]  67.44,98.93 0 top
STANDOFF88  STAND-OFF  [STAND-OFF]  67.44,87.5 0 top
STANDOFF89  STAND-OFF  [STAND-OFF]  83.19,98.93 0 top
STANDOFF90  STAND-OFF  [STAND-OFF]  83.19,87.5 0 top
STANDOFF91  STAND-OFF  [STAND-OFF]  98.93,98.93 0 top
STANDOFF92  STAND-OFF  [STAND-OFF]  98.93,87.5 0 top
STANDOFF93  STAND-OFF  [STAND-OFF]  114.68,98.93 0 top
STANDOFF94  STAND-OFF  [STAND-OFF]  114.68,87.5 0 top
STANDOFF95  STAND-OFF  [STAND-OFF]  130.43,98.93 0 top
STANDOFF96  STAND-OFF  [STAND-OFF]  130.43,87.5 0 top
STANDOFF97  STAND-OFF  [STAND-OFF]  20.19,114.68 0 top
STANDOFF98  STAND-OFF  [STAND-OFF]  20.19,103.25 0 top
STANDOFF99  STAND-OFF  [STAND-OFF]  35.94,114.68 0 top
STANDOFF100  STAND-OFF  [STAND-OFF]  35.94,103.25 0 top
STANDOFF101  STAND-OFF  [STAND-OFF]  51.69,114.68 0 top
STANDOFF102  STAND-OFF  [STAND-OFF]  51.69,103.25 0 top
STANDOFF103  STAND-OFF  [STAND-OFF]  67.44,114.68 0 top
STANDOFF104  STAND-OFF  [STAND-OFF]  67.44,103.25 0 top
STANDOFF105  STAND-OFF  [STAND-OFF]  83.19,114.68 0 top
STANDOFF106  STAND-OFF  [STAND-OFF]  83.19,103.25 0 top
STANDOFF107  STAND-OFF  [STAND-OFF]  98.93,114.68 0 top
STANDOFF108  STAND-OFF  [STAND-OFF]  98.93,103.25 0 top
STANDOFF109  STAND-OFF  [STAND-OFF]  114.68,114.68 0 top
STANDOFF110  STAND-OFF  [STAND-OFF]  114.68,103.25 0 top
STANDOFF111  STAND-OFF  [STAND-OFF]  130.43,114.68 0 top
STANDOFF112  STAND-OFF  [STAND-OFF]  130.43,103.25 0 top
STANDOFF113  STAND-OFF  [STAND-OFF]  20.19,130.43 0 top
STANDOFF114  STAND-OFF  [STAND-OFF]  20.19,119 0 top
STANDOFF115  STAND-OFF  [STAND-OFF]  35.94,130.43 0 top
STANDOFF116  STAND-OFF  [STAND-OFF]  35.94,119 0 top
STANDOFF117  STAND-OFF  [STAND-OFF]  51.69,130.43 0 top
STANDOFF118  STAND-OFF  [STAND-OFF]  51.69,119 0 top
STANDOFF119  STAND-OFF  [STAND-OFF]  67.44,130.43 0 top
STANDOFF120  STAND-OFF  [STAND-OFF]  67.44,119 0 top
STANDOFF121  STAND-OFF  [STAND-OFF]  83.19,130.43 0 top
STANDOFF122  STAND-OFF  [STAND-OFF]  83.19,119 0 top
STANDOFF123  STAND-OFF  [STAND-OFF]  98.93,130.43 0 top
STANDOFF124  STAND-OFF  [STAND-OFF]  98.93,119 0 top
STANDOFF125  STAND-OFF  [STAND-OFF]  114.68,130.43 0 top
STANDOFF126  STAND-OFF  [STAND-OFF]  114.68,119 0 top
STANDOFF127  STAND-OFF  [STAND-OFF]  130.43,130.43 0 top
STANDOFF128  STAND-OFF  [STAND-OFF]  130.43,119 0 top
U1  DAC_MCP4725SOT-CP  [SOT23-6-MCP4725]  14.48,14.48 90 top
U2  DAC_MCP4725SOT-CP  [SOT23-6-MCP4725]  30.23,14.48 90 top
U3  DAC_MCP4725SOT-CP  [SOT23-6-MCP4725]  45.97,14.48 90 top
U4  DAC_MCP4725SOT-CP  [SOT23-6-MCP4725]  61.72,14.48 90 top
U5  DAC_MCP4725SOT-CP  [SOT23-6-MCP4725]  77.47,14.48 90 top
U6  DAC_MCP4725SOT-CP  [SOT23-6-MCP4725]  93.22,14.48 90 top
U7  DAC_MCP4725SOT-CP  [SOT23-6-MCP4725]  108.97,14.48 90 top
U8  DAC_MCP4725SOT-CP  [SOT23-6-MCP4725]  124.71,14.48 90 top
U9  DAC_MCP4725SOT-CP  [SOT23-6-MCP4725]  14.48,30.23 90 top
U10  DAC_MCP4725SOT-CP  [SOT23-6-MCP4725]  30.23,30.23 90 top
U11  DAC_MCP4725SOT-CP  [SOT23-6-MCP4725]  45.97,30.23 90 top
U12  DAC_MCP4725SOT-CP  [SOT23-6-MCP4725]  61.72,30.23 90 top
U13  DAC_MCP4725SOT-CP  [SOT23-6-MCP4725]  77.47,30.23 90 top
U14  DAC_MCP4725SOT-CP  [SOT23-6-MCP4725]  93.22,30.23 90 top
U15  DAC_MCP4725SOT-CP  [SOT23-6-MCP4725]  108.97,30.23 90 top
U16  DAC_MCP4725SOT-CP  [SOT23-6-MCP4725]  124.71,30.23 90 top
U17  DAC_MCP4725SOT-CP  [SOT23-6-MCP4725]  14.48,45.97 90 top